# EAGLE board hand_pcb (EAGLE 7.3.0), part 1 of 3
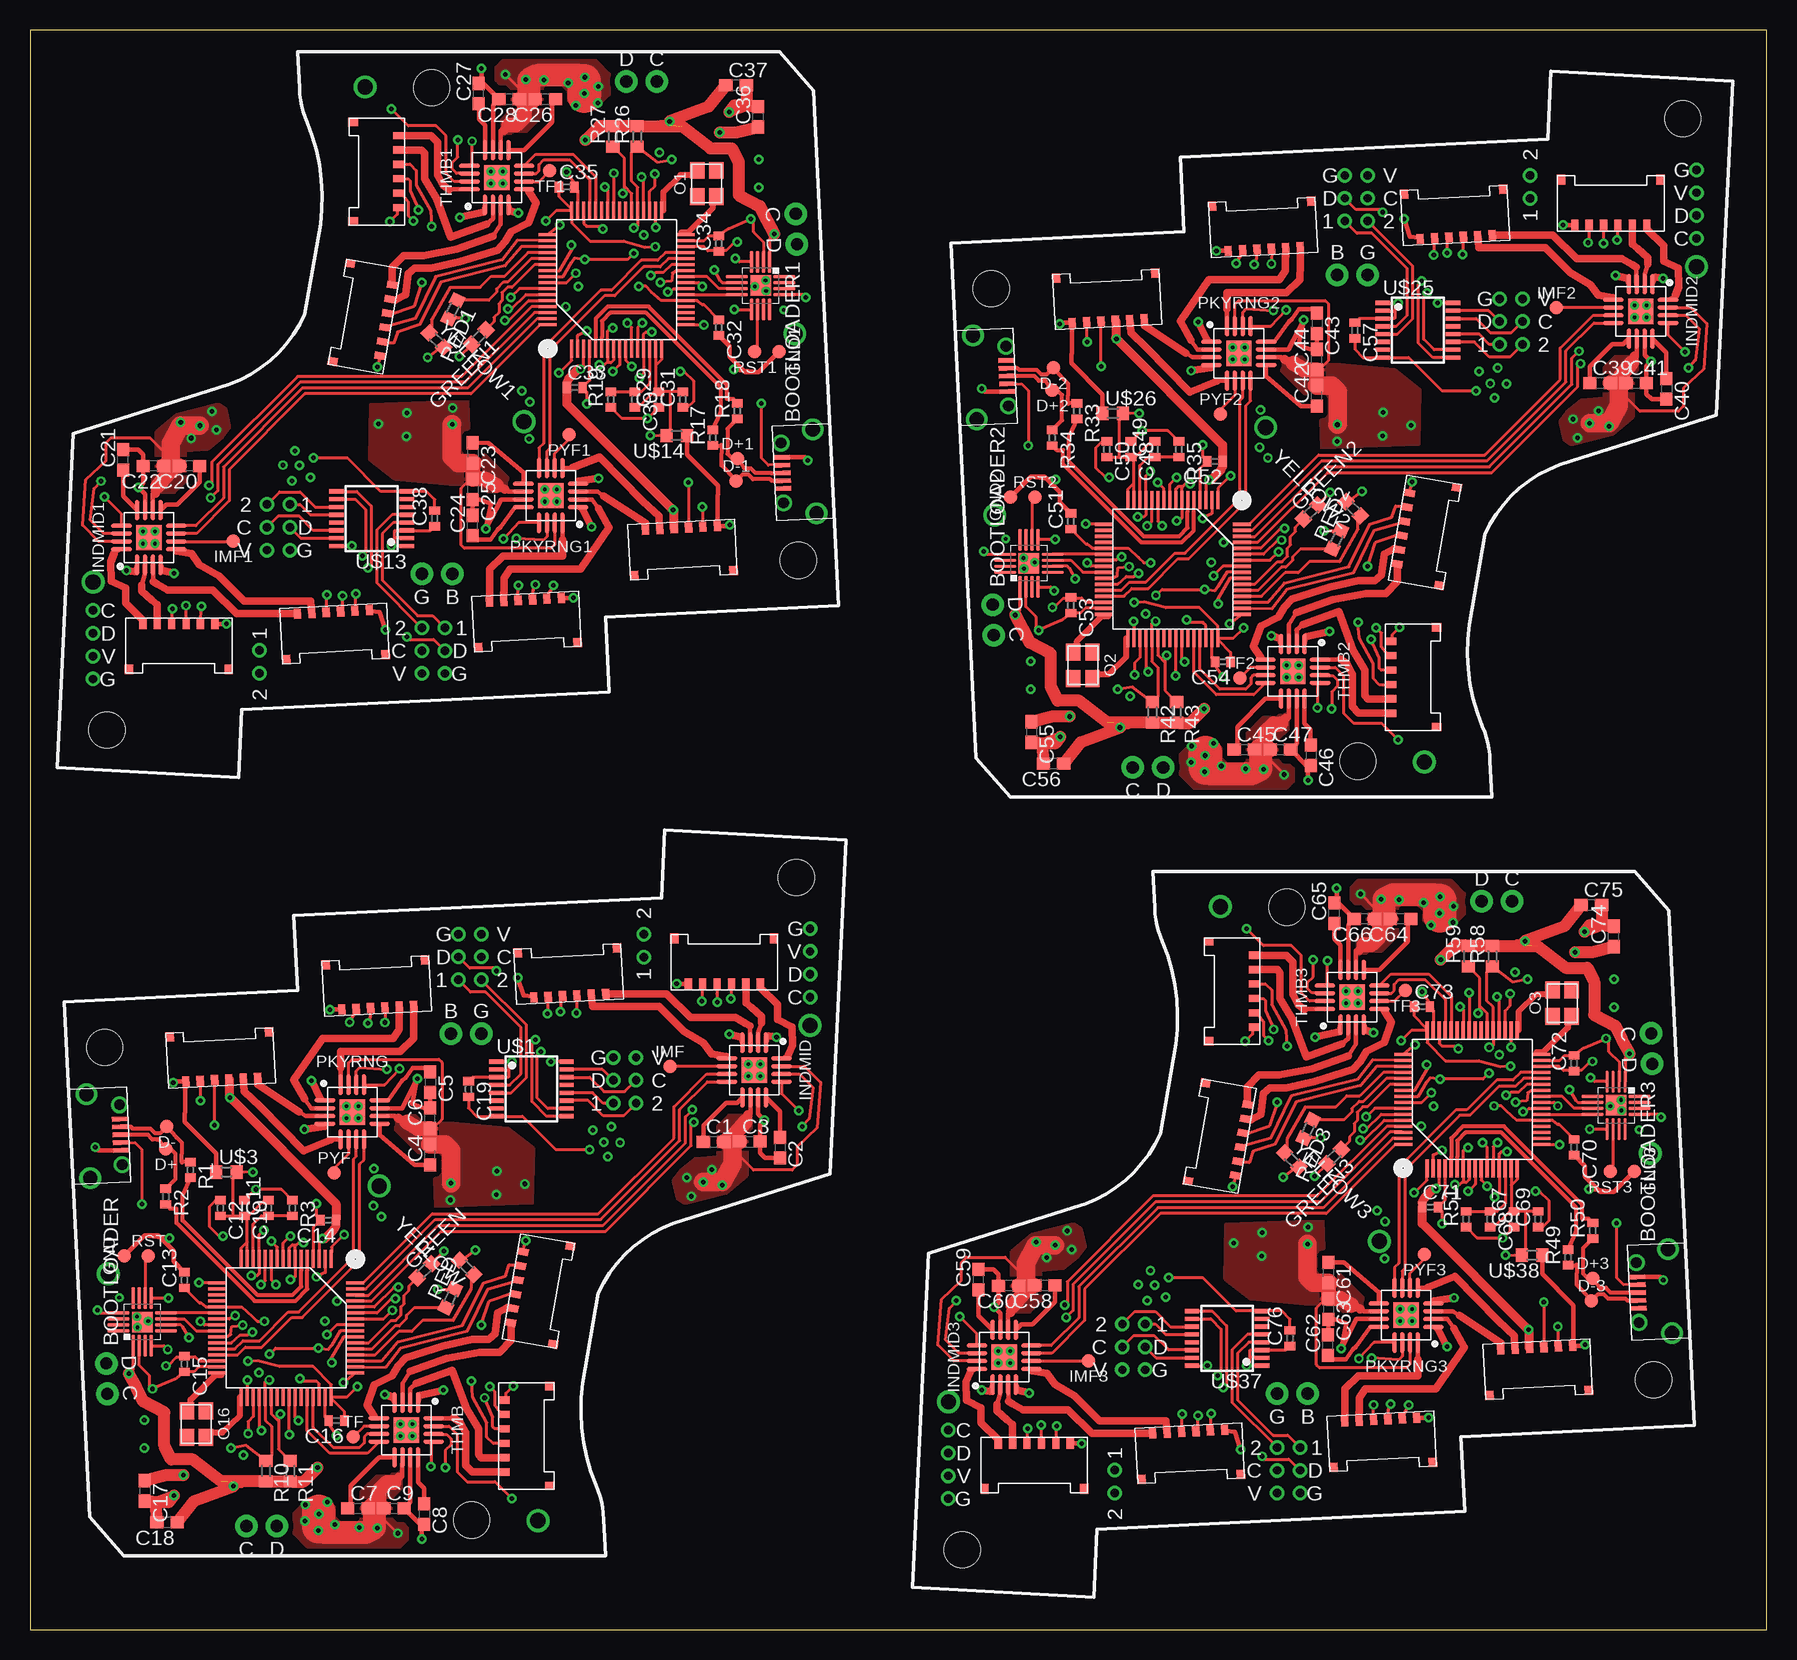
[diagram p0: board, top side]
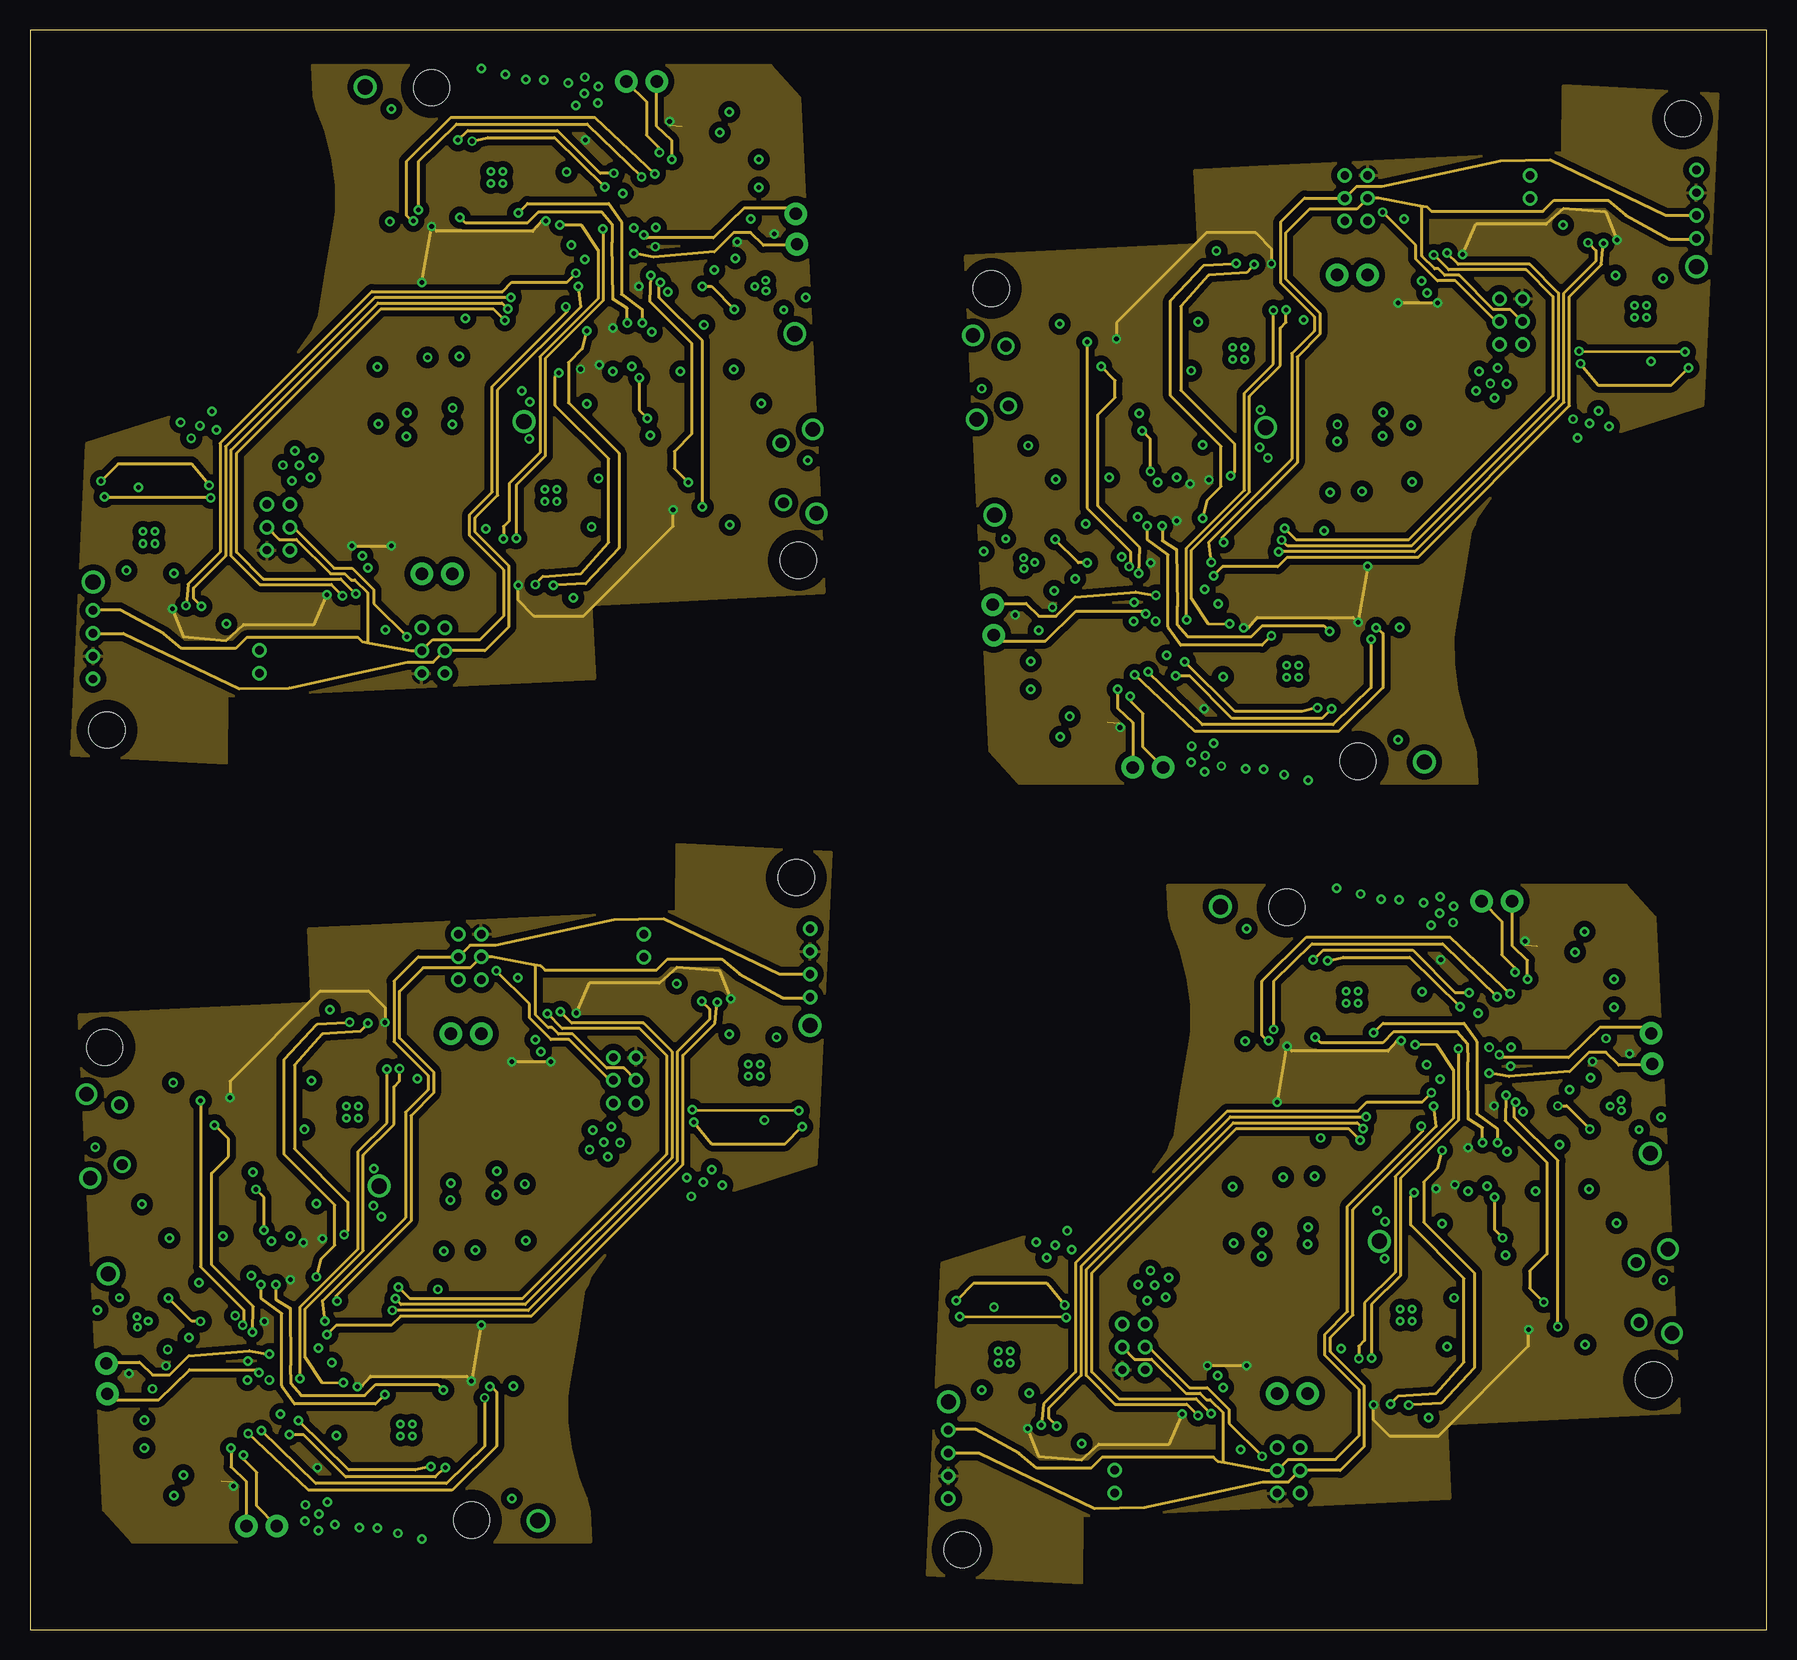
[diagram p1: board, inner layer Route2]
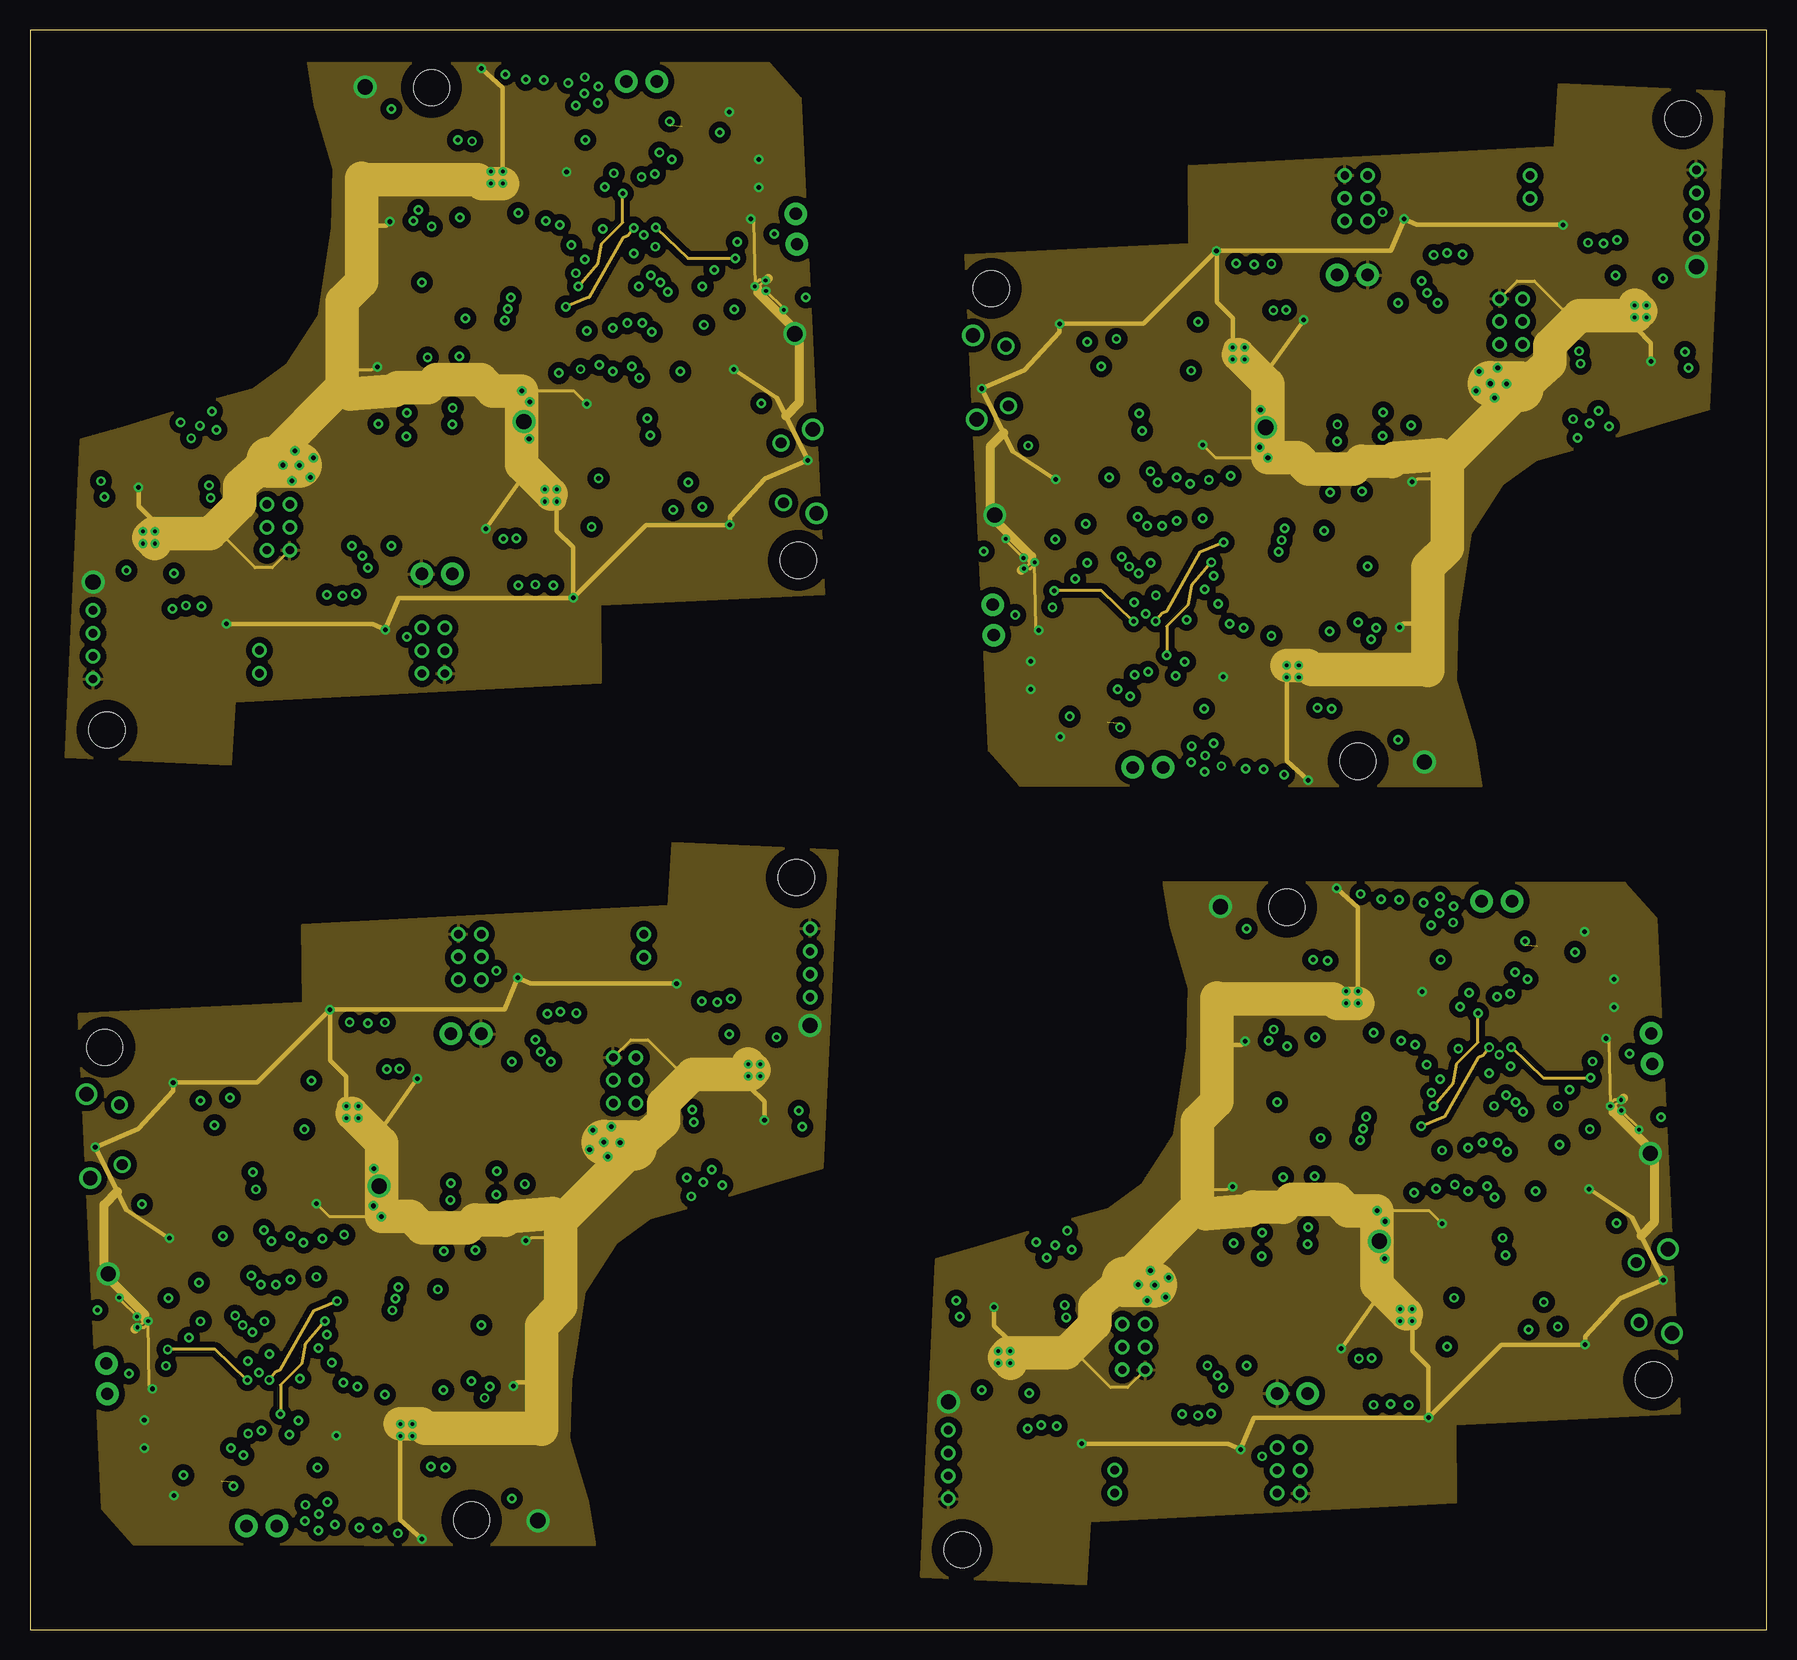
[diagram p2: board, inner layer Route15]
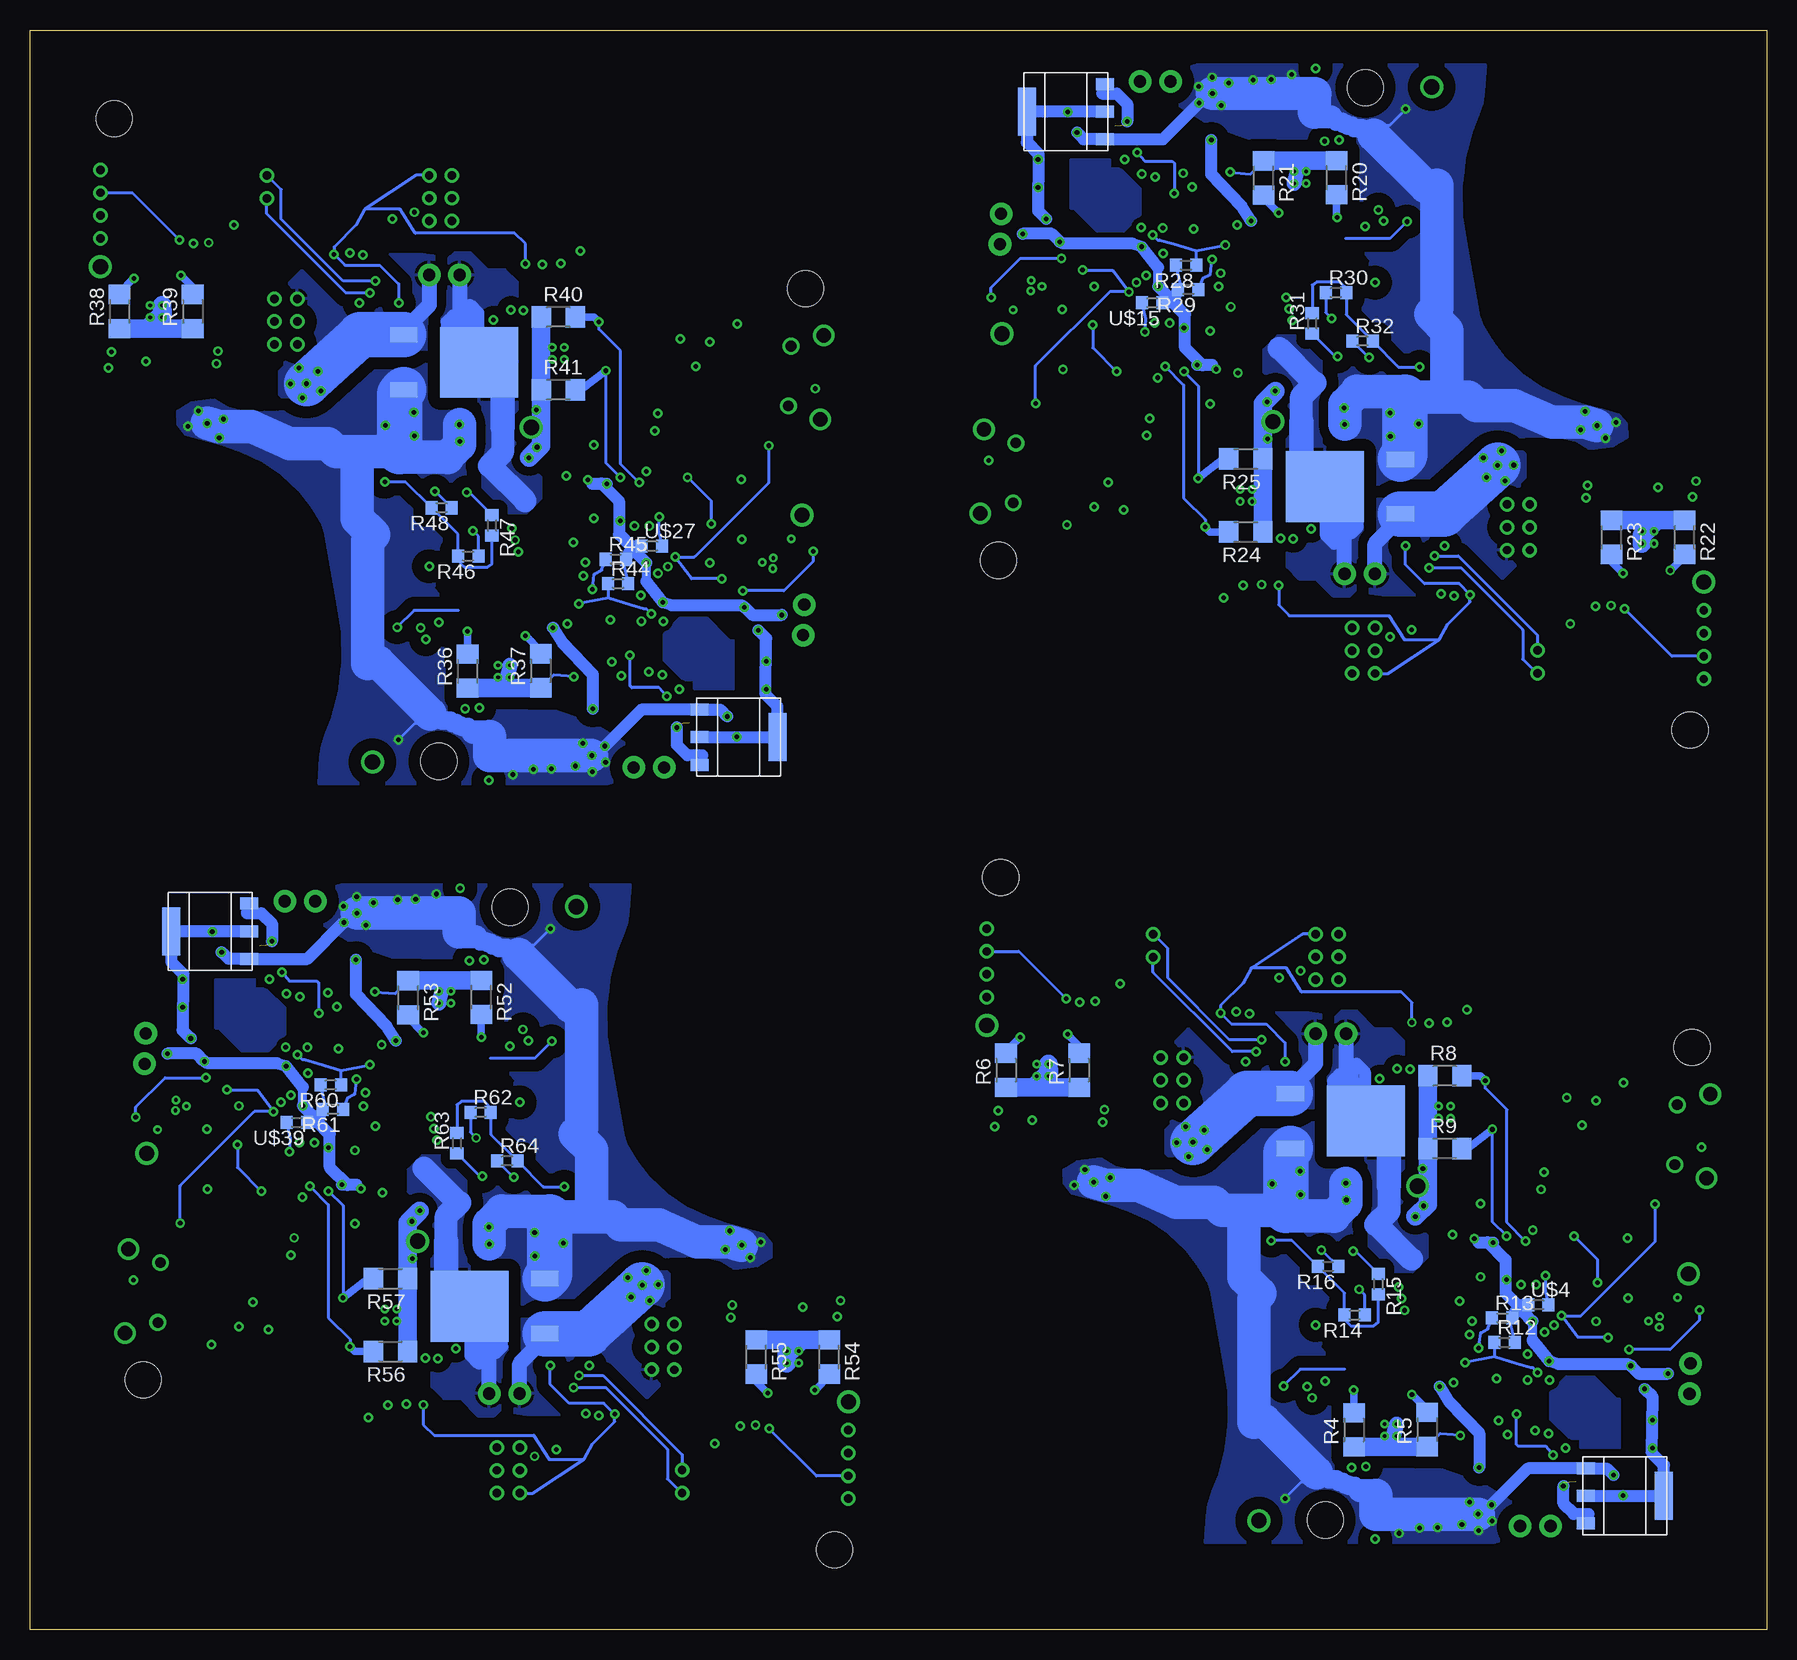
[diagram p3: board, bottom side, seen from below]

Size 144.78 x 133.35 mm. Coordinates in mm from the lower left corner, seen from the top.
Outline: 0,0 144.78,0 144.78,133.35 0,133.35 0,0
Copper layers (1*2*15*16): Top 0.035mm / dielectric 0.2mm / Route2 0.035mm / dielectric 0.2mm / Route15 0.035mm / dielectric 0.2mm / Bottom 0.035mm
Design rules "default *": minimum track width 10mil, minimum drill 15mil, track to track 6mil, track to pad 6mil, pad to pad 6mil, via to via 6mil, smd to smd 6mil, copper to edge 40mil, drill to drill 8mil, minimum pad ring 10mil, minimum via ring 8mil, stop-mask expansion 4mil, vias tented up to drill 0mil, thermal gap 10mil
Net classes: 1 USB: width 0.333 mm, drill 0.333 mm, clearance 0.178 mm; 2 VCC_Pour: clearance 0.762 mm to class 1; 3 GND_Pour: clearance 0.762 mm to class 1
Holes 3 mm at 6.24,48.55 63.87,62.7 36.81,9.15 64.04,89.15 6.41,75 33.47,128.55 80.13,111.79 137.76,125.94 110.7,72.39 135.34,20.82 77.71,6.67 104.77,60.22
tKeepout: area 4.1,46.4 to 8.3,50.6; area 61.8,60.6 to 66,64.8; area 34.7,7 to 38.9,11.2; area 61.9,87 to 66.1,91.2; area 4.3,72.9 to 8.5,77.1; area 31.4,126.4 to 35.6,130.6; area 78,109.7 to 82.2,113.9; area 135.7,123.8 to 139.9,128; area 108.6,70.3 to 112.8,74.5; area 133.2,18.7 to 137.4,22.9; area 75.6,4.6 to 79.8,8.8; area 102.7,58.1 to 106.9,62.3

## Footprints (pad centres in the part's own frame; a part is rotated, then mirrored left to right if it is on the bottom)
QFN16 = smd 1.85 x 0.3: 1 -1.975,0.75; 2 -1.975,0.25; 3 -1.975,-0.25; 4 -1.975,-0.75; 9 1.975,-0.75; 10 1.975,-0.25; 11 1.975,0.25; 12 1.975,0.75 | smd 0.3 x 1.85: 5 -0.75,-1.975; 6 -0.25,-1.975; 7 0.25,-1.975; 8 0.75,-1.975; 13 0.75,1.975; 14 0.25,1.975; 15 -0.25,1.975; 16 -0.75,1.975 | smd 1.7 x 1.7: TH 0,0
C0603 = smd 1.1 x 1: 1 -0.85,0; 2 0.85,0
C0402 = smd 0.7 x 0.9: 1 -0.65,0; 2 0.65,0
TESTPAD = smd 1.143 x 1.143: P$1 0,0
L0603 = smd 1 x 1.1: 1 -0.85,0; 2 0.85,0
LQFP-64-10-10 = smd 1.5 x 0.254: 1 -5.75,3.75; 2 -5.75,3.25; 3 -5.75,2.75; 4 -5.75,2.25; 5 -5.75,1.75; 6 -5.75,1.25; 7 -5.75,0.75; 8 -5.75,0.25; 9 -5.75,-0.25; 10 -5.75,-0.75; 11 -5.75,-1.25; 12 -5.75,-1.75; 13 -5.75,-2.25; 14 -5.75,-2.75; 15 -5.75,-3.25; 16 -5.75,-3.75; 33 5.75,-3.75; 34 5.75,-3.25; 35 5.75,-2.75; 36 5.75,-2.25; 37 5.75,-1.75; 38 5.75,-1.25; 39 5.75,-0.75; 40 5.75,-0.25; 41 5.75,0.25; 42 5.75,0.75; 43 5.75,1.25; 44 5.75,1.75; 45 5.75,2.25; 46 5.75,2.75; 47 5.75,3.25; 48 5.75,3.75 | smd 0.254 x 1.5: 17 -3.75,-5.75; 18 -3.25,-5.75; 19 -2.75,-5.75; 20 -2.25,-5.75; 21 -1.75,-5.75; 22 -1.25,-5.75; 23 -0.75,-5.75; 24 -0.25,-5.75; 25 0.25,-5.75; 26 0.75,-5.75; 27 1.25,-5.75; 28 1.75,-5.75; 29 2.25,-5.75; 30 2.75,-5.75; 31 3.25,-5.75; 32 3.75,-5.75; 49 3.75,5.75; 50 3.25,5.75; 51 2.75,5.75; 52 2.25,5.75; 53 1.75,5.75; 54 1.25,5.75; 55 0.75,5.75; 56 0.25,5.75; 57 -0.25,5.75; 58 -0.75,5.75; 59 -1.25,5.75; 60 -1.75,5.75; 61 -2.25,5.75; 62 -2.75,5.75; 63 -3.25,5.75; 64 -3.75,5.75
DF57H-6P-TOP = smd 0.6 x 0.85: 1 -3,2.3; 2 -1.8,2.3; 3 -0.6,2.3; 4 0.6,2.3; 5 1.8,2.3; 6 3,2.3 | smd 0.7 x 0.8: P$1 -4.15,-1.475; P$2 4.15,-1.475
WQFN-16 = smd 1.75 x 0.35: 1 -2.275,0.975; 2 -2.275,0.325; 3 -2.275,-0.325; 4 -2.275,-0.975; 9 2.275,-0.975; 10 2.275,-0.325; 11 2.275,0.325; 12 2.275,0.975 | smd 0.35 x 1.75: 5 -0.975,-2.275; 6 -0.325,-2.275; 7 0.325,-2.275; 8 0.975,-2.275; 13 0.975,2.275; 14 0.325,2.275; 15 -0.325,2.275; 16 -0.975,2.275 | smd 2.1 x 2.1: PPAD 0,0
NX3225SA = smd 1.4 x 1.2: 1 -1.1,-0.8; 2 1.1,-0.8; 3 1.1,0.8; 4 -1.1,0.8
R0402 = smd 0.7 x 0.9: 1 -0.65,0; 2 0.65,0
R1206 = smd 1.6 x 1.803: 1 -1.422,0; 2 1.422,0
R0603 = smd 1 x 1.1: 1 -0.85,0; 2 0.85,0
TSSOP16 = smd 0.35 x 1.2: 1 -2.275,-2.925; 2 -1.625,-2.925; 3 -0.975,-2.925; 4 -0.325,-2.925; 5 0.325,-2.925; 6 0.975,-2.925; 7 1.625,-2.925; 8 2.275,-2.925; 9 2.275,2.925; 10 1.625,2.925; 11 0.975,2.925; 12 0.325,2.925; 13 -0.325,2.925; 14 -0.975,2.925; 15 -1.625,2.925; 16 -2.275,2.925
PG-TO-252-3 = smd 1.295 x 2.311: 1 -2.286,-4.191; 3 2.286,-4.191 | smd 5.893 x 6.502: 2 0,2.095
PSENSE = drill 0.7: 1 0,-3.81; 2 1.905,-3.81; C 1.905,-1.905; D 0,-1.905; G 0,0; V 1.905,0
PSENSE2 = drill 0.7: 1 0,0; 2 1.905,0
PSENSE4 = drill 0.7: C 0,-5.715; D 0,-3.81; G 0,0; V 0,-1.905
MIC39100 = smd 1 x 1.5: 1 -2.3,-3.25; 2 0,-3.25; 3 2.3,-3.25 | smd 4 x 1.5: TAB 0,3.25
THRUHOLE2 = drill 1.016 pad 1.88: B -1.27,0; G 1.27,0
THRUHOLEI2C = drill 1.016 pad 1.88: SCL 1.27,0; SDA -1.27,0
10118194-0001LF = smd 0.4 x 1.35: 1 -1.3,2.7; 2 -0.65,2.7; 3 0,2.7; 4 0.65,2.7; 5 1.3,2.7 | drill 0.9 pad 1.4: P$6 -2.5,2.7; P$7 2.5,2.7 | drill 1.2: P$8 -3.5,0; P$9 3.5,0

## Placement (x,y rotation side)
BOOTLOADER  MKL02Z32CORRECT  [QFN16]  9.37,25.65 90 top
BOOTLOADER1  MKL02Z32CORRECT  [QFN16]  60.91,112.05 270 top
BOOTLOADER2  MKL02Z32CORRECT  [QFN16]  83.26,88.89 90 top
BOOTLOADER3  MKL02Z32CORRECT  [QFN16]  132.21,43.72 270 top
C1  0.01  [C0603]  56.98,40.68 0 top
C2  2.2  [C0603]  62.52,40.18 270 top
C3  10  [C0603]  60,40.69 0 top
C4  0.01  [C0603]  33.37,39.61 90 top
C5  2.2  [C0603]  33.37,45.64 270 top
C6  10  [C0603]  33.37,42.63 90 top
C7  0.01  [C0603]  27.33,10.12 0 top
C8  2.2  [C0603]  32.87,9.65 270 top
C9  10  [C0603]  30.35,10.13 0 top
C10  2.2  [C0402]  17.87,35.15 270 top
C11  0.1  [C0402]  19.87,35.15 90 top
C12  0.1  [C0402]  15.87,35.15 270 top
C13  0.1  [C0402]  12.87,29.15 90 top
C14  0.1  [C0402]  24.87,34.15 180 top
C15  0.1  [C0402]  12.87,22.15 270 top
C16  0.1  [C0402]  25.54,17.44 180 top
C17  [C0603]  9.58,11.58 270 top
C18  [C0603]  11.43,8.94 180 top
C19  0.1  [C0402]  36.55,45.06 270 top
C20  0.01  [C0603]  13.3,97.01 180 top
C21  2.2  [C0603]  7.76,97.51 90 top
C22  10  [C0603]  10.28,97.01 180 top
C23  0.01  [C0603]  36.91,98.09 270 top
C24  2.2  [C0603]  36.91,92.05 90 top
C25  10  [C0603]  36.91,95.06 270 top
C26  0.01  [C0603]  42.95,127.57 180 top
C27  2.2  [C0603]  37.41,128.05 90 top
C28  10  [C0603]  39.93,127.57 180 top
C29  2.2  [C0402]  52.41,102.55 90 top
C30  0.1  [C0402]  50.41,102.55 270 top
C31  0.1  [C0402]  54.41,102.55 90 top
C32  0.1  [C0402]  57.41,108.55 270 top
C33  0.1  [C0402]  45.41,103.55 0 top
C34  0.1  [C0402]  57.41,115.55 90 top
C35  0.1  [C0402]  44.74,120.26 0 top
C36  [C0603]  60.71,126.11 90 top
C37  [C0603]  58.85,128.75 0 top
C38  0.1  [C0402]  33.73,92.63 90 top
C39  0.01  [C0603]  130.87,103.93 0 top
C40  2.2  [C0603]  136.41,103.43 270 top
C41  10  [C0603]  133.89,103.93 0 top
C42  0.01  [C0603]  107.26,102.85 90 top
C43  2.2  [C0603]  107.26,108.89 270 top
C44  10  [C0603]  107.26,105.88 90 top
C45  0.01  [C0603]  101.22,73.37 0 top
C46  2.2  [C0603]  106.76,72.89 270 top
C47  10  [C0603]  104.24,73.37 0 top
C48  2.2  [C0402]  91.76,98.39 270 top
C49  0.1  [C0402]  93.76,98.39 90 top
C50  0.1  [C0402]  89.76,98.39 270 top
C51  0.1  [C0402]  86.76,92.39 90 top
C52  0.1  [C0402]  98.76,97.39 180 top
C53  0.1  [C0402]  86.76,85.39 270 top
C54  0.1  [C0402]  99.43,80.68 180 top
C55  [C0603]  83.46,74.83 270 top
C56  [C0603]  85.32,72.19 180 top
C57  0.1  [C0402]  110.44,108.31 270 top
C58  0.01  [C0603]  84.6,28.69 180 top
C59  2.2  [C0603]  79.06,29.19 90 top
C60  10  [C0603]  81.58,28.68 180 top
C61  0.01  [C0603]  108.21,29.76 270 top
C62  2.2  [C0603]  108.21,23.72 90 top
C63  10  [C0603]  108.21,26.73 270 top
C64  0.01  [C0603]  114.25,59.25 180 top
C65  2.2  [C0603]  108.71,59.72 90 top
C66  10  [C0603]  111.23,59.24 180 top
C67  2.2  [C0402]  123.71,34.22 90 top
C68  0.1  [C0402]  121.71,34.22 270 top
C69  0.1  [C0402]  125.71,34.22 90 top
C70  0.1  [C0402]  128.71,40.22 270 top
C71  0.1  [C0402]  116.71,35.22 0 top
C72  0.1  [C0402]  128.71,47.22 90 top
C73  0.1  [C0402]  116.04,51.93 0 top
C74  [C0603]  132,57.78 90 top
C75  [C0603]  130.15,60.43 0 top
C76  0.1  [C0402]  105.03,24.31 90 top
D+  TESTPAD  [TESTPAD]  11.32,40.08 180 top
D+1  TESTPAD  [TESTPAD]  58.96,97.61 0 top
D+2  TESTPAD  [TESTPAD]  85.21,103.33 180 top
D+3  TESTPAD  [TESTPAD]  130.26,29.29 0 top
D-  TESTPAD  [TESTPAD]  11.41,41.94 180 top
D-1  TESTPAD  [TESTPAD]  58.87,95.75 0 top
D-2  TESTPAD  [TESTPAD]  85.3,105.19 180 top
D-3  TESTPAD  [TESTPAD]  130.17,27.42 0 top
GND  TESTPAD  [TESTPAD]  7.85,31.17 90 top
GND1  TESTPAD  [TESTPAD]  62.43,106.53 270 top
GND2  TESTPAD  [TESTPAD]  81.74,94.41 90 top
GND3  TESTPAD  [TESTPAD]  133.73,38.2 270 top
GREEN  LED0603  [L0603]  32.87,29.92 45 top
GREEN1  LED0603  [L0603]  37.41,107.77 225 top
GREEN2  LED0603  [L0603]  106.76,93.17 45 top
GREEN3  LED0603  [L0603]  108.71,39.45 225 top
HAND_MICRO  MK20DX256VLH7  [LQFP-64-10-10]  21.37,25.15 270 top
HAND_MICRO1  MK20DX256VLH7  [LQFP-64-10-10]  48.91,112.55 90 top
HAND_MICRO2  MK20DX256VLH7  [LQFP-64-10-10]  95.26,88.39 270 top
HAND_MICRO3  MK20DX256VLH7  [LQFP-64-10-10]  120.21,44.22 90 top
IMF  TESTPAD  [TESTPAD]  53.34,46.94 0 top
IMF1  TESTPAD  [TESTPAD]  16.94,90.75 180 top
IMF2  TESTPAD  [TESTPAD]  127.23,110.19 0 top
IMF3  TESTPAD  [TESTPAD]  88.24,22.43 180 top
INDEX  DF57H-6PTOP  [DF57H-6P-TOP]  57.87,56.15 180 top
INDEX1  DF57H-6PTOP  [DF57H-6P-TOP]  12.41,81.55 0 top
INDEX2  DF57H-6PTOP  [DF57H-6P-TOP]  131.76,119.39 180 top
INDEX3  DF57H-6PTOP  [DF57H-6P-TOP]  83.71,13.22 0 top
INDMID  DRV8833  [WQFN-16]  60.37,46.65 270 top
INDMID1  DRV8833  [WQFN-16]  9.91,91.05 90 top
INDMID2  DRV8833  [WQFN-16]  134.26,109.89 270 top
INDMID3  DRV8833  [WQFN-16]  81.21,22.72 90 top
MIDDLE  DF57H-6PTOP  [DF57H-6P-TOP]  44.87,55.15 183 top
MIDDLE1  DF57H-6PTOP  [DF57H-6P-TOP]  25.41,82.55 3 top
MIDDLE2  DF57H-6PTOP  [DF57H-6P-TOP]  118.76,118.39 183 top
MIDDLE3  DF57H-6PTOP  [DF57H-6P-TOP]  96.71,14.22 3 top
O1  16MHz  [NX3225SA]  56.41,120.55 90 top
O2  16MHz  [NX3225SA]  87.76,80.39 270 top
O3  16MHz  [NX3225SA]  127.71,52.22 90 top
O16  16MHz  [NX3225SA]  13.87,17.15 270 top
PINKY  DF57H-6PTOP  [DF57H-6P-TOP]  15.87,48.15 183 top
PINKY1  DF57H-6PTOP  [DF57H-6P-TOP]  54.41,89.55 3 top
PINKY2  DF57H-6PTOP  [DF57H-6P-TOP]  89.76,111.39 183 top
PINKY3  DF57H-6PTOP  [DF57H-6P-TOP]  125.71,21.22 3 top
PKYRNG  DRV8833  [WQFN-16]  26.87,43.15 0 top
PKYRNG1  DRV8833  [WQFN-16]  43.41,94.55 180 top
PKYRNG2  DRV8833  [WQFN-16]  100.76,106.39 0 top
PKYRNG3  DRV8833  [WQFN-16]  114.71,26.22 180 top
PYF  TESTPAD  [TESTPAD]  25.35,38.07 0 top
PYF1  TESTPAD  [TESTPAD]  44.93,99.62 180 top
PYF2  TESTPAD  [TESTPAD]  99.24,101.32 0 top
PYF3  TESTPAD  [TESTPAD]  116.23,31.29 180 top
R1  33  [R0402]  13.37,38.33 270 top
R2  33  [R0402]  11.32,36.11 270 top
R3  470  [R0402]  21.87,35.15 270 top
R4  0.2  [R1206]  34.42,16.66 90 bottom
R5  0.2  [R1206]  28.32,16.69 90 bottom
R6  0.2  [R1206]  63.42,46.63 90 bottom
R7  0.2  [R1206]  57.33,46.63 90 bottom
R8  0.2  [R1206]  26.85,46.18 0 bottom
R9  0.2  [R1206]  26.85,40.11 0 bottom
R10  1k  [R0603]  19.67,13.23 270 top
R11  1k  [R0603]  21.69,13.23 270 top
R12  1k  [R0603]  21.87,23.95 0 bottom
R13  1k  [R0603]  22.06,25.98 0 bottom
R14  100  [R0603]  34.37,26.24 180 bottom
R15  200  [R0603]  32.38,28.8 270 bottom
R16  200  [R0603]  36.58,30.28 180 bottom
R17  33  [R0402]  56.91,99.36 90 top
R18  33  [R0402]  58.96,101.59 90 top
R19  470  [R0402]  48.41,102.55 90 top
R20  0.2  [R1206]  35.86,121.03 270 bottom
R21  0.2  [R1206]  41.96,121.01 270 bottom
R22  0.2  [R1206]  6.86,91.06 270 bottom
R23  0.2  [R1206]  12.95,91.06 270 bottom
R24  0.2  [R1206]  43.43,91.52 180 bottom
R25  0.2  [R1206]  43.43,97.59 180 bottom
R26  1k  [R0603]  50.61,124.46 90 top
R27  1k  [R0603]  48.59,124.46 90 top
R28  1k  [R0603]  48.41,113.74 180 bottom
R29  1k  [R0603]  48.22,111.71 180 bottom
R30  100  [R0603]  35.92,111.46 0 bottom
R31  200  [R0603]  37.9,108.89 90 bottom
R32  200  [R0603]  33.71,107.42 0 bottom
R33  33  [R0402]  87.26,101.58 270 top
R34  33  [R0402]  85.21,99.35 270 top
R35  470  [R0402]  95.76,98.39 270 top
R36  0.2  [R1206]  108.31,79.91 90 bottom
R37  0.2  [R1206]  102.21,79.93 90 bottom
R38  0.2  [R1206]  137.31,109.88 90 bottom
R39  0.2  [R1206]  131.22,109.88 90 bottom
R40  0.2  [R1206]  100.74,109.42 0 bottom
R41  0.2  [R1206]  100.74,103.35 0 bottom
R42  1k  [R0603]  93.56,76.48 270 top
R43  1k  [R0603]  95.58,76.48 270 top
R44  1k  [R0603]  95.76,87.2 0 bottom
R45  1k  [R0603]  95.95,89.23 0 bottom
R46  100  [R0603]  108.25,89.48 180 bottom
R47  200  [R0603]  106.27,92.05 270 bottom
R48  200  [R0603]  110.46,93.52 180 bottom
R49  33  [R0402]  128.21,31.03 90 top
R50  33  [R0402]  130.26,33.26 90 top
R51  470  [R0402]  119.71,34.22 90 top
R52  0.2  [R1206]  107.16,52.7 270 bottom
R53  0.2  [R1206]  113.26,52.68 270 bottom
R54  0.2  [R1206]  78.16,22.73 270 bottom
R55  0.2  [R1206]  84.25,22.73 270 bottom
R56  0.2  [R1206]  114.73,23.19 180 bottom
R57  0.2  [R1206]  114.73,29.26 180 bottom
R58  1k  [R0603]  121.91,56.13 90 top
R59  1k  [R0603]  119.89,56.13 90 top
R60  1k  [R0603]  119.71,45.42 180 bottom
R61  1k  [R0603]  119.52,43.38 180 bottom
R62  100  [R0603]  107.21,43.13 0 bottom
R63  200  [R0603]  109.19,40.56 90 bottom
R64  200  [R0603]  105,39.09 0 bottom
RED  LED0603  [L0603]  35.03,27.64 65 top
RED1  LED0603  [L0603]  35.26,110.06 245 top
RED2  LED0603  [L0603]  108.92,90.88 65 top
RED3  LED0603  [L0603]  106.55,41.73 245 top
RING  DF57H-6PTOP  [DF57H-6P-TOP]  28.87,54.15 183 top
RING1  DF57H-6PTOP  [DF57H-6P-TOP]  41.41,83.55 3 top
RING2  DF57H-6PTOP  [DF57H-6P-TOP]  102.76,117.39 183 top
RING3  DF57H-6PTOP  [DF57H-6P-TOP]  112.71,15.22 3 top
RST  TESTPAD  [TESTPAD]  9.87,31.17 0 top
RST1  TESTPAD  [TESTPAD]  60.41,106.53 180 top
RST2  TESTPAD  [TESTPAD]  83.76,94.41 0 top
RST3  TESTPAD  [TESTPAD]  131.71,38.2 180 top
TF  TESTPAD  [TESTPAD]  26.95,16.08 0 top
TF1  TESTPAD  [TESTPAD]  43.33,121.62 180 top
TF2  TESTPAD  [TESTPAD]  100.84,79.32 0 top
TF3  TESTPAD  [TESTPAD]  114.63,53.29 180 top
THMB  DRV8833  [WQFN-16]  31.37,16.65 270 top
THMB1  DRV8833  [WQFN-16]  38.91,121.05 90 top
THMB2  DRV8833  [WQFN-16]  105.26,79.89 270 top
THMB3  DRV8833  [WQFN-16]  110.21,52.72 90 top
THUMB_A  DF57H-6PTOP  [DF57H-6P-TOP]  41.87,16.15 90 top
THUMB_A1  DF57H-6PTOP  [DF57H-6P-TOP]  28.41,121.55 270 top
THUMB_A2  DF57H-6PTOP  [DF57H-6P-TOP]  115.76,79.39 90 top
THUMB_A3  DF57H-6PTOP  [DF57H-6P-TOP]  99.71,53.22 270 top
THUMB_B  DF57H-6PTOP  [DF57H-6P-TOP]  42.87,28.15 80 top
THUMB_B1  DF57H-6PTOP  [DF57H-6P-TOP]  27.41,109.55 260 top
THUMB_B2  DF57H-6PTOP  [DF57H-6P-TOP]  116.76,91.39 80 top
THUMB_B3  DF57H-6PTOP  [DF57H-6P-TOP]  98.71,41.22 260 top
U$1  TCA9534TSSOP  [TSSOP16]  41.8,45.08 270 top
U$2  SPD15P10PLG  [PG-TO-252-3]  35.53,42.41 270 bottom
U$3  [L0603]  16.37,38.15 0 top
U$4  [L0603]  19.05,27.08 0 bottom
U$5  PSENSE  [PSENSE]  35.71,57.99 0 top
U$6  PSENSE2  [PSENSE2]  51.16,56.06 90 top
U$7  PSENSE  [PSENSE]  48.62,47.7 0 top
U$8  PSENSE4  [PSENSE4]  65.02,58.45 0 top
U$9  MIC391003.3  [MIC39100]  11.84,11.15 270 bottom
U$10  THRUHOLE2  [THRUHOLE2]  36.35,49.68 0 top
U$11  THRUHOLEI2C  [THRUHOLEI2C]  19.3,8.64 180 top
U$12  THRUHOLEI2C  [THRUHOLEI2C]  6.4,20.93 272 top
U$13  TCA9534TSSOP  [TSSOP16]  28.48,92.62 90 top
U$14  [L0603]  53.91,99.55 180 top
U$15  [L0603]  51.23,110.61 180 bottom
U$16  SPD15P10PLG  [PG-TO-252-3]  34.75,95.29 90 bottom
U$17  PSENSE  [PSENSE]  34.57,79.71 180 top
U$18  PSENSE  [PSENSE]  21.67,89.99 180 top
U$19  PSENSE2  [PSENSE2]  19.13,81.64 270 top
U$20  PSENSE4  [PSENSE4]  5.26,79.25 180 top
U$21  MIC391003.3  [MIC39100]  58.45,126.54 90 bottom
U$22  THRUHOLE2  [THRUHOLE2]  33.93,88.01 180 top
U$23  THRUHOLEI2C  [THRUHOLEI2C]  50.98,129.06 0 top
U$24  THRUHOLEI2C  [THRUHOLEI2C]  63.88,116.76 92 top
U$25  TCA9534TSSOP  [TSSOP16]  115.69,108.32 270 top
U$26  [L0603]  90.26,101.39 0 top
U$27  [L0603]  92.94,90.33 0 bottom
U$28  SPD15P10PLG  [PG-TO-252-3]  109.42,105.65 270 bottom
U$29  PSENSE  [PSENSE]  109.6,121.23 0 top
U$30  PSENSE  [PSENSE]  122.5,110.95 0 top
U$31  PSENSE2  [PSENSE2]  125.04,119.3 90 top
U$32  PSENSE4  [PSENSE4]  138.91,121.69 0 top
U$33  MIC391003.3  [MIC39100]  85.72,74.4 270 bottom
U$34  THRUHOLE2  [THRUHOLE2]  110.24,112.93 0 top
U$35  THRUHOLEI2C  [THRUHOLEI2C]  93.19,71.88 180 top
U$36  THRUHOLEI2C  [THRUHOLEI2C]  80.29,84.18 272 top
U$37  TCA9534TSSOP  [TSSOP16]  99.78,24.29 90 top
U$38  [L0603]  125.21,31.22 180 top
U$39  [L0603]  122.53,42.28 180 bottom
U$40  SPD15P10PLG  [PG-TO-252-3]  106.05,26.96 90 bottom
U$41  PSENSE  [PSENSE]  105.87,11.38 180 top
U$42  PSENSE  [PSENSE]  92.96,21.67 180 top
U$43  PSENSE2  [PSENSE2]  90.42,13.31 270 top
U$44  PSENSE4  [PSENSE4]  76.56,10.92 180 top
U$45  MIC391003.3  [MIC39100]  129.74,58.22 90 bottom
U$46  THRUHOLE2  [THRUHOLE2]  105.23,19.68 180 top
U$47  THRUHOLEI2C  [THRUHOLEI2C]  122.28,60.73 0 top
U$48  THRUHOLEI2C  [THRUHOLEI2C]  135.18,48.44 92 top
USB  10118194-0001LF  [10118194-0001LF]  4.87,41.15 272.5 top
USB1  10118194-0001LF  [10118194-0001LF]  65.41,96.55 92.5 top
USB2  10118194-0001LF  [10118194-0001LF]  78.76,104.39 272.5 top
USB3  10118194-0001LF  [10118194-0001LF]  136.71,28.22 92.5 top
YELLOW  LED0603  [L0603]  36.4,30.2 135 top
YELLOW1  LED0603  [L0603]  33.88,107.49 315 top
YELLOW2  LED0603  [L0603]  110.29,93.45 135 top
YELLOW3  LED0603  [L0603]  105.18,39.17 315 top

## Library data of the parts
BOOTLOADER BOOTLOADER1-BOOTLOADER3 D+ D+1-D+3 D- D-1-D-3 GND GND1-GND3 GREEN GREEN1-GREEN3 HAND_MICRO HAND_MICRO1-HAND_MICRO3 IMF IMF1-IMF3 INDEX INDEX1-INDEX3 INDMID INDMID1-INDMID3 MIDDLE MIDDLE1-MIDDLE3 O1-O3 O16 PINKY PINKY1-PINKY3 PKYRNG PKYRNG1-PKYRNG3 PYF PYF1-PYF3 RED RED1-RED3 RING RING1-RING3 RST RST1-RST3 TF TF1-TF3 THMB THMB1-THMB3 THUMB_A THUMB_A1-THUMB_A3 THUMB_B THUMB_B1-THUMB_B3 U$1-U$48 USB USB1-USB3 YELLOW YELLOW1-YELLOW3 = 445-eagle-lib
C1-C76 R1-R64 = rcl

## Nets
+3V1: BOOTLOADER1.1 C32.1 C33.1 C34.1 C35.1 C37.1 C38.1 HAND_MICRO1.3 HAND_MICRO1.7 HAND_MICRO1.8 HAND_MICRO1.21 HAND_MICRO1.30 HAND_MICRO1.48 INDEX1.3 MIDDLE1.3 PINKY1.3 R26.2 R27.2 R28.2 R29.2 RING1.3 THUMB_A1.3 THUMB_B1.3 U$13.1 U$13.2 U$13.3 U$13.16 U$15.1 U$17.V U$18.V U$20.V U$21.3
+3V2: BOOTLOADER2.1 C51.1 C52.1 C53.1 C54.1 C56.1 C57.1 HAND_MICRO2.3 HAND_MICRO2.7 HAND_MICRO2.8 HAND_MICRO2.21 HAND_MICRO2.30 HAND_MICRO2.48 INDEX2.3 MIDDLE2.3 PINKY2.3 R42.2 R43.2 R44.2 R45.2 RING2.3 THUMB_A2.3 THUMB_B2.3 U$25.1 U$25.2 U$25.3 U$25.16 U$27.1 U$29.V U$30.V U$32.V U$33.3
+3V3: BOOTLOADER.1 C13.1 C14.1 C15.1 C16.1 C18.1 C19.1 HAND_MICRO.3 HAND_MICRO.7 HAND_MICRO.8 HAND_MICRO.21 HAND_MICRO.30 HAND_MICRO.48 INDEX.3 MIDDLE.3 PINKY.3 R10.2 R11.2 R12.2 R13.2 RING.3 THUMB_A.3 THUMB_B.3 U$1.1 U$1.2 U$1.3 U$1.16 U$4.1 U$5.V U$7.V U$8.V U$9.3
+3V4: BOOTLOADER3.1 C70.1 C71.1 C72.1 C73.1 C75.1 C76.1 HAND_MICRO3.3 HAND_MICRO3.7 HAND_MICRO3.8 HAND_MICRO3.21 HAND_MICRO3.30 HAND_MICRO3.48 INDEX3.3 MIDDLE3.3 PINKY3.3 R58.2 R59.2 R60.2 R61.2 RING3.3 THUMB_A3.3 THUMB_B3.3 U$37.1 U$37.2 U$37.3 U$37.16 U$39.1 U$41.V U$42.V U$44.V U$45.3
+5V: C1.2 C3.1 C4.2 C6.1 C7.2 C9.1 C17.1 INDMID.10 INDMID.15 PKYRNG.10 PKYRNG.15 THMB.10 THMB.15 U$2.3 U$9.1
+5V1: C20.2 C22.1 C23.2 C25.1 C26.2 C28.1 C36.1 INDMID1.10 INDMID1.15 PKYRNG1.10 PKYRNG1.15 THMB1.10 THMB1.15 U$16.3 U$21.1
+5V2: C39.2 C41.1 C42.2 C44.1 C45.2 C47.1 C55.1 INDMID2.10 INDMID2.15 PKYRNG2.10 PKYRNG2.15 THMB2.10 THMB2.15 U$28.3 U$33.1
+5V3: C58.2 C60.1 C61.2 C63.1 C64.2 C66.1 C74.1 INDMID3.10 INDMID3.15 PKYRNG3.10 PKYRNG3.15 THMB3.10 THMB3.15 U$40.3 U$45.1
EN1: U$1.4 U$5.1
EN2: U$1.5 U$5.2
EN3: U$1.12 U$7.1
EN4: U$1.11 U$7.2
EN5: U$1.10 U$6.1
EN6: U$1.9 U$6.2
EN7: U$13.4 U$17.1
EN8: U$13.5 U$17.2
EN9: U$13.9 U$19.2
EN10: U$13.12 U$18.1
EN11: U$13.11 U$18.2
EN12: U$13.10 U$19.1
EN13: U$25.4 U$29.1
EN14: U$25.5 U$29.2
EN15: U$25.9 U$31.2
EN16: U$25.12 U$30.1
EN17: U$25.11 U$30.2
EN18: U$25.10 U$31.1
EN19: U$37.4 U$41.1
EN20: U$37.5 U$41.2
EN21: U$37.9 U$43.2
EN22: U$37.12 U$42.1
EN23: U$37.11 U$42.2
EN24: U$37.10 U$43.1
GND: BOOTLOADER.2 BOOTLOADER.TH C2.2 C3.2 C5.2 C6.2 C8.2 C9.2 C13.2 C14.2 C15.2 C16.2 C17.2 C18.2 C19.2 GND.P$1 HAND_MICRO.4 HAND_MICRO.31 HAND_MICRO.47 INDEX.6 INDMID.11 INDMID.PPAD MIDDLE.6 PINKY.6 PKYRNG.11 PKYRNG.PPAD R4.1 R5.1 R6.1 R7.1 R8.1 R9.1 R14.2 R15.2 R16.2 RING.6 THMB.11 THMB.PPAD THUMB_A.6 THUMB_B.6 U$1.8 U$2.1 U$3.1 U$5.G U$7.G U$8.G U$9.2 U$9.TAB U$10.G USB.5
GND1: BOOTLOADER1.2 BOOTLOADER1.TH C21.2 C22.2 C24.2 C25.2 C27.2 C28.2 C32.2 C33.2 C34.2 C35.2 C36.2 C37.2 C38.2 GND1.P$1 HAND_MICRO1.4 HAND_MICRO1.31 HAND_MICRO1.47 INDEX1.6 INDMID1.11 INDMID1.PPAD MIDDLE1.6 PINKY1.6 PKYRNG1.11 PKYRNG1.PPAD R20.1 R21.1 R22.1 R23.1 R24.1 R25.1 R30.2 R31.2 R32.2 RING1.6 THMB1.11 THMB1.PPAD THUMB_A1.6 THUMB_B1.6 U$13.8 U$14.1 U$16.1 U$17.G U$18.G U$20.G U$21.2 U$21.TAB U$22.G USB1.5
GND2: BOOTLOADER2.2 BOOTLOADER2.TH C40.2 C41.2 C43.2 C44.2 C46.2 C47.2 C51.2 C52.2 C53.2 C54.2 C55.2 C56.2 C57.2 GND2.P$1 HAND_MICRO2.4 HAND_MICRO2.31 HAND_MICRO2.47 INDEX2.6 INDMID2.11 INDMID2.PPAD MIDDLE2.6 PINKY2.6 PKYRNG2.11 PKYRNG2.PPAD R36.1 R37.1 R38.1 R39.1 R40.1 R41.1 R46.2 R47.2 R48.2 RING2.6 THMB2.11 THMB2.PPAD THUMB_A2.6 THUMB_B2.6 U$25.8 U$26.1 U$28.1 U$29.G U$30.G U$32.G U$33.2 U$33.TAB U$34.G USB2.5
GND3: BOOTLOADER3.2 BOOTLOADER3.TH C59.2 C60.2 C62.2 C63.2 C65.2 C66.2 C70.2 C71.2 C72.2 C73.2 C74.2 C75.2 C76.2 GND3.P$1 HAND_MICRO3.4 HAND_MICRO3.31 HAND_MICRO3.47 INDEX3.6 INDMID3.11 INDMID3.PPAD MIDDLE3.6 PINKY3.6 PKYRNG3.11 PKYRNG3.PPAD R52.1 R53.1 R54.1 R55.1 R56.1 R57.1 R62.2 R63.2 R64.2 RING3.6 THMB3.11 THMB3.PPAD THUMB_A3.6 THUMB_B3.6 U$37.8 U$38.1 U$40.1 U$41.G U$42.G U$44.G U$45.2 U$45.TAB U$46.G USB3.5
IDX1: INDEX.1 INDMID.16
IDX2: INDEX.2 INDMID.2
IDX3: INDEX1.1 INDMID1.16
IDX4: INDEX1.2 INDMID1.2
IDX5: INDEX2.1 INDMID2.16
IDX6: INDEX2.2 INDMID2.2
IDX7: INDEX3.1 INDMID3.16
IDX8: INDEX3.2 INDMID3.2
IDXENC1: HAND_MICRO.58 INDEX.5
IDXENC2: HAND_MICRO.57 INDEX.4
IDXENC3: HAND_MICRO1.57 INDEX1.4
IDXENC4: HAND_MICRO1.58 INDEX1.5
IDXENC5: HAND_MICRO2.57 INDEX2.4
IDXENC6: HAND_MICRO2.58 INDEX2.5
IDXENC7: HAND_MICRO3.57 INDEX3.4
IDXENC8: HAND_MICRO3.58 INDEX3.5
IDXISEN: INDMID.1 R6.2
IDXISEN1: INDMID1.1 R22.2
IDXISEN2: INDMID2.1 R38.2
IDXISEN3: INDMID3.1 R54.2
IDXPWM1: HAND_MICRO.61 INDMID.14
IDXPWM2: HAND_MICRO.62 INDMID.13
IDXPWM3: HAND_MICRO1.62 INDMID1.13
IDXPWM4: HAND_MICRO1.61 INDMID1.14
IDXPWM5: HAND_MICRO2.62 INDMID2.13
IDXPWM6: HAND_MICRO2.61 INDMID2.14
IDXPWM7: HAND_MICRO3.62 INDMID3.13
IDXPWM8: HAND_MICRO3.61 INDMID3.14
LED0: HAND_MICRO.53 RED.1
LED1: GREEN.1 HAND_MICRO.54
LED2: HAND_MICRO.52 YELLOW.1
LED3: HAND_MICRO1.53 RED1.1
LED4: GREEN1.1 HAND_MICRO1.54
LED5: HAND_MICRO1.52 YELLOW1.1
LED6: HAND_MICRO2.53 RED2.1
LED7: GREEN2.1 HAND_MICRO2.54
LED8: HAND_MICRO2.52 YELLOW2.1
LED9: HAND_MICRO3.53 RED3.1
LED10: GREEN3.1 HAND_MICRO3.54
LED11: HAND_MICRO3.52 YELLOW3.1
MID1: INDMID.5 MIDDLE.2
MID2: INDMID.3 MIDDLE.1
MID3: INDMID1.3 MIDDLE1.1
MID4: INDMID1.5 MIDDLE1.2
MID5: INDMID2.3 MIDDLE2.1
MID6: INDMID2.5 MIDDLE2.2
MID7: INDMID3.3 MIDDLE3.1
MID8: INDMID3.5 MIDDLE3.2
MIDENC1: HAND_MICRO.60 MIDDLE.5
MIDENC2: HAND_MICRO.59 MIDDLE.4
MIDENC3: HAND_MICRO1.59 MIDDLE1.4
MIDENC4: HAND_MICRO1.60 MIDDLE1.5
MIDENC5: HAND_MICRO2.59 MIDDLE2.4
MIDENC6: HAND_MICRO2.60 MIDDLE2.5
MIDENC7: HAND_MICRO3.59 MIDDLE3.4
MIDENC8: HAND_MICRO3.60 MIDDLE3.5
MIDISEN: INDMID.4 R7.2
MIDISEN1: INDMID1.4 R23.2
MIDISEN2: INDMID2.4 R39.2
MIDISEN3: INDMID3.4 R55.2
MIDPWM1: HAND_MICRO.64 INDMID.7
MIDPWM2: HAND_MICRO.63 INDMID.8
MIDPWM3: HAND_MICRO1.63 INDMID1.8
MIDPWM4: HAND_MICRO1.64 INDMID1.7
MIDPWM5: HAND_MICRO2.63 INDMID2.8
MIDPWM6: HAND_MICRO2.64 INDMID2.7
MIDPWM7: HAND_MICRO3.63 INDMID3.8
MIDPWM8: HAND_MICRO3.64 INDMID3.7
N$1: R14.1 RED.2
N$2: GREEN.2 R15.1
N$3: R16.1 YELLOW.2
N$4: IMF.P$1 INDMID.6
N$5: PKYRNG.6 PYF.P$1
N$6: TF.P$1 THMB.6
N$7: C10.1 HAND_MICRO.13 R3.1 U$4.2
N$8: BOOTLOADER.9 HAND_MICRO.24
N$9: C11.1 HAND_MICRO.14 R3.2
N$10: BOOTLOADER.8 HAND_MICRO.22
N$11: BOOTLOADER.7 HAND_MICRO.25
N$12: BOOTLOADER.10 RST.P$1
N$13: BOOTLOADER1.4 BOOTLOADER1.13 HAND_MICRO1.34
N$14: C29.2 C30.2 C31.2 HAND_MICRO1.15 HAND_MICRO1.16 U$14.2
N$15: C20.1 INDMID1.9
N$16: C23.1 PKYRNG1.9
N$17: BOOTLOADER.4 BOOTLOADER.13 HAND_MICRO.34
N$18: C10.2 C11.2 C12.2 HAND_MICRO.15 HAND_MICRO.16 U$3.2
N$19: C26.1 THMB1.9
N$20: C27.1 THMB1.12
N$21: C1.1 INDMID.9
N$22: C4.1 PKYRNG.9
N$23: C7.1 THMB.9
N$24: HAND_MICRO.33 O16.3
N$25: C8.1 THMB.12
N$26: C5.1 PKYRNG.12
N$27: C2.1 INDMID.12
N$28: HAND_MICRO.32 O16.1
N$29: C24.1 PKYRNG1.12
N$30: C21.1 INDMID1.12
N$31: HAND_MICRO1.33 O1.3
N$32: HAND_MICRO1.32 O1.1
N$33: C31.1 HAND_MICRO1.17
N$34: C12.1 HAND_MICRO.17
N$35: BOOTLOADER.6 HAND_MICRO.23 USB.4
N$36: BOOTLOADER1.6 HAND_MICRO1.23 USB1.4
N$37: R30.1 RED1.2
N$38: GREEN1.2 R31.1
N$39: R32.1 YELLOW1.2
N$40: IMF1.P$1 INDMID1.6
N$41: PKYRNG1.6 PYF1.P$1
N$42: TF1.P$1 THMB1.6
N$43: C29.1 HAND_MICRO1.13 R19.1 U$15.2
N$44: C30.1 HAND_MICRO1.14 R19.2
N$45: BOOTLOADER1.9 HAND_MICRO1.24
N$46: BOOTLOADER1.8 HAND_MICRO1.22
N$47: BOOTLOADER1.7 HAND_MICRO1.25
N$48: BOOTLOADER1.10 RST1.P$1
N$49: BOOTLOADER2.4 BOOTLOADER2.13 HAND_MICRO2.34
N$50: C48.2 C49.2 C50.2 HAND_MICRO2.15 HAND_MICRO2.16 U$26.2
N$51: C39.1 INDMID2.9
N$52: C42.1 PKYRNG2.9
N$53: C45.1 THMB2.9
N$54: C46.1 THMB2.12
N$55: C43.1 PKYRNG2.12
N$56: C40.1 INDMID2.12
N$57: HAND_MICRO2.33 O2.3
N$58: HAND_MICRO2.32 O2.1
N$59: C50.1 HAND_MICRO2.17
N$60: BOOTLOADER2.6 HAND_MICRO2.23 USB2.4
N$61: R46.1 RED2.2
N$62: GREEN2.2 R47.1
N$63: R48.1 YELLOW2.2
N$64: IMF2.P$1 INDMID2.6
N$65: PKYRNG2.6 PYF2.P$1
N$66: TF2.P$1 THMB2.6
N$67: C48.1 HAND_MICRO2.13 R35.1 U$27.2
N$68: C49.1 HAND_MICRO2.14 R35.2
N$69: BOOTLOADER2.9 HAND_MICRO2.24
N$70: BOOTLOADER2.8 HAND_MICRO2.22
N$71: BOOTLOADER2.7 HAND_MICRO2.25
N$72: BOOTLOADER2.10 RST2.P$1
N$73: BOOTLOADER3.4 BOOTLOADER3.13 HAND_MICRO3.34
N$74: C67.2 C68.2 C69.2 HAND_MICRO3.15 HAND_MICRO3.16 U$38.2
N$75: C58.1 INDMID3.9
N$76: C61.1 PKYRNG3.9
N$77: C64.1 THMB3.9
N$78: C65.1 THMB3.12
N$79: C62.1 PKYRNG3.12
N$80: C59.1 INDMID3.12
N$81: HAND_MICRO3.33 O3.3
N$82: HAND_MICRO3.32 O3.1
N$83: C69.1 HAND_MICRO3.17
N$84: BOOTLOADER3.6 HAND_MICRO3.23 USB3.4
N$85: R62.1 RED3.2
N$86: GREEN3.2 R63.1
N$87: R64.1 YELLOW3.2
N$88: IMF3.P$1 INDMID3.6
N$89: PKYRNG3.6 PYF3.P$1
N$90: TF3.P$1 THMB3.6
N$91: C67.1 HAND_MICRO3.13 R51.1 U$39.2
N$92: C68.1 HAND_MICRO3.14 R51.2
N$93: BOOTLOADER3.9 HAND_MICRO3.24
N$94: BOOTLOADER3.8 HAND_MICRO3.22
N$95: BOOTLOADER3.7 HAND_MICRO3.25
N$96: BOOTLOADER3.10 RST3.P$1
PKY1: PINKY.2 PKYRNG.5
PKY2: PINKY.1 PKYRNG.3
PKY3: PINKY1.2 PKYRNG1.5
PKY4: PINKY1.1 PKYRNG1.3
PKY5: PINKY2.2 PKYRNG2.5
PKY6: PINKY2.1 PKYRNG2.3
PKY7: PINKY3.2 PKYRNG3.5
PKY8: PINKY3.1 PKYRNG3.3
PKYENC1: HAND_MICRO.26 PINKY.5
PKYENC2: HAND_MICRO.27 PINKY.4
PKYENC3: HAND_MICRO1.26 PINKY1.5
PKYENC4: HAND_MICRO1.27 PINKY1.4
PKYENC5: HAND_MICRO2.26 PINKY2.5
PKYENC6: HAND_MICRO2.27 PINKY2.4
PKYENC7: HAND_MICRO3.26 PINKY3.5
PKYENC8: HAND_MICRO3.27 PINKY3.4
PKYISEN: HAND_MICRO.9 PKYRNG.4 R9.2
PKYISEN1: HAND_MICRO1.9 PKYRNG1.4 R25.2
PKYISEN2: HAND_MICRO2.9 PKYRNG2.4 R41.2
PKYISEN3: HAND_MICRO3.9 PKYRNG3.4 R57.2
PKYPWM1: HAND_MICRO.28 PKYRNG.7
PKYPWM2: HAND_MICRO.29 PKYRNG.8
PKYPWM3: HAND_MICRO1.29 PKYRNG1.8
PKYPWM4: HAND_MICRO1.28 PKYRNG1.7
PKYPWM5: HAND_MICRO2.29 PKYRNG2.8
PKYPWM6: HAND_MICRO2.28 PKYRNG2.7
PKYPWM7: HAND_MICRO3.29 PKYRNG3.8
PKYPWM8: HAND_MICRO3.28 PKYRNG3.7
RNG1: PKYRNG.16 RING.1
RNG2: PKYRNG.2 RING.2
RNG3: PKYRNG1.16 RING1.1
RNG4: PKYRNG1.2 RING1.2
RNG5: PKYRNG2.16 RING2.1
RNG6: PKYRNG2.2 RING2.2
RNG7: PKYRNG3.16 RING3.1
RNG8: PKYRNG3.2 RING3.2
RNGENC1: HAND_MICRO.2 RING.5
RNGENC2: HAND_MICRO.1 RING.4
RNGENC3: HAND_MICRO1.1 RING1.4
RNGENC4: HAND_MICRO1.2 RING1.5
RNGENC5: HAND_MICRO2.1 RING2.4
RNGENC6: HAND_MICRO2.2 RING2.5
RNGENC7: HAND_MICRO3.1 RING3.4
RNGENC8: HAND_MICRO3.2 RING3.5
RNGISEN: HAND_MICRO.10 PKYRNG.1 R8.2
RNGISEN1: HAND_MICRO1.10 PKYRNG1.1 R24.2
RNGISEN2: HAND_MICRO2.10 PKYRNG2.1 R40.2
RNGISEN3: HAND_MICRO3.10 PKYRNG3.1 R56.2
RNGPWM1: HAND_MICRO.46 PKYRNG.14
RNGPWM2: HAND_MICRO.49 PKYRNG.13
RNGPWM3: HAND_MICRO1.49 PKYRNG1.13
RNGPWM4: HAND_MICRO1.46 PKYRNG1.14
RNGPWM5: HAND_MICRO2.49 PKYRNG2.13
RNGPWM6: HAND_MICRO2.46 PKYRNG2.14
RNGPWM7: HAND_MICRO3.49 PKYRNG3.13
RNGPWM8: HAND_MICRO3.46 PKYRNG3.14
SCL0: HAND_MICRO.37 R10.1 U$1.14 U$5.C U$7.C U$8.C U$11.SCL
SCL1: HAND_MICRO.55 R12.1 U$12.SCL
SCL2: HAND_MICRO1.37 R26.1 U$13.14 U$17.C U$18.C U$20.C U$23.SCL
SCL3: HAND_MICRO1.55 R28.1 U$24.SCL
SCL4: HAND_MICRO2.37 R42.1 U$25.14 U$29.C U$30.C U$32.C U$35.SCL
SCL5: HAND_MICRO2.55 R44.1 U$36.SCL
SCL6: HAND_MICRO3.37 R58.1 U$37.14 U$41.C U$42.C U$44.C U$47.SCL
SCL7: HAND_MICRO3.55 R60.1 U$48.SCL
SDA0: HAND_MICRO.38 R11.1 U$1.15 U$5.D U$7.D U$8.D U$11.SDA
SDA1: HAND_MICRO.56 R13.1 U$12.SDA
SDA2: HAND_MICRO1.38 R27.1 U$13.15 U$17.D U$18.D U$20.D U$23.SDA
SDA3: HAND_MICRO1.56 R29.1 U$24.SDA
SDA4: HAND_MICRO2.38 R43.1 U$25.15 U$29.D U$30.D U$32.D U$35.SDA
SDA5: HAND_MICRO2.56 R45.1 U$36.SDA
SDA6: HAND_MICRO3.38 R59.1 U$37.15 U$41.D U$42.D U$44.D U$47.SDA
SDA7: HAND_MICRO3.56 R61.1 U$48.SDA
THA1: THMB.16 THUMB_A.1
THA2: THMB.2 THUMB_A.2
THA3: THMB1.16 THUMB_A1.1
THA4: THMB1.2 THUMB_A1.2
THA5: THMB2.16 THUMB_A2.1
THA6: THMB2.2 THUMB_A2.2
THA7: THMB3.16 THUMB_A3.1
THA8: THMB3.2 THUMB_A3.2
THAENC1: HAND_MICRO.35 THUMB_A.5
THAENC2: HAND_MICRO.36 THUMB_A.4
THAENC3: HAND_MICRO1.36 THUMB_A1.4
THAENC4: HAND_MICRO1.35 THUMB_A1.5
THAENC5: HAND_MICRO2.36 THUMB_A2.4
THAENC6: HAND_MICRO2.35 THUMB_A2.5
THAENC7: HAND_MICRO3.36 THUMB_A3.4
THAENC8: HAND_MICRO3.35 THUMB_A3.5
THAISEN: HAND_MICRO.11 R4.2 THMB.1
THAISEN1: HAND_MICRO1.11 R20.2 THMB1.1
THAISEN2: HAND_MICRO2.11 R36.2 THMB2.1
THAISEN3: HAND_MICRO3.11 R52.2 THMB3.1
THAPWM1: HAND_MICRO.41 THMB.14
THAPWM2: HAND_MICRO.42 THMB.13
THAPWM3: HAND_MICRO1.42 THMB1.13
THAPWM4: HAND_MICRO1.41 THMB1.14
THAPWM5: HAND_MICRO2.42 THMB2.13
THAPWM6: HAND_MICRO2.41 THMB2.14
THAPWM7: HAND_MICRO3.42 THMB3.13
THAPWM8: HAND_MICRO3.41 THMB3.14
THB1: THMB.5 THUMB_B.2
THB2: THMB.3 THUMB_B.1
THB3: THMB1.3 THUMB_B1.1
THB4: THMB1.5 THUMB_B1.2
THB5: THMB2.3 THUMB_B2.1
THB6: THMB2.5 THUMB_B2.2
THB7: THMB3.3 THUMB_B3.1
THB8: THMB3.5 THUMB_B3.2
THBENC1: HAND_MICRO.51 THUMB_B.5
THBENC2: HAND_MICRO.50 THUMB_B.4
THBENC3: HAND_MICRO1.50 THUMB_B1.4
THBENC4: HAND_MICRO1.51 THUMB_B1.5
THBENC5: HAND_MICRO2.50 THUMB_B2.4
THBENC6: HAND_MICRO2.51 THUMB_B2.5
THBENC7: HAND_MICRO3.50 THUMB_B3.4
THBENC8: HAND_MICRO3.51 THUMB_B3.5
THBISEN: HAND_MICRO.12 R5.2 THMB.4
THBISEN1: HAND_MICRO1.12 R21.2 THMB1.4
THBISEN2: HAND_MICRO2.12 R37.2 THMB2.4
THBISEN3: HAND_MICRO3.12 R53.2 THMB3.4
THBPWM1: HAND_MICRO.45 THMB.7
THBPWM2: HAND_MICRO.44 THMB.8
THBPWM3: HAND_MICRO1.44 THMB1.8
THBPWM4: HAND_MICRO1.45 THMB1.7
THBPWM5: HAND_MICRO2.44 THMB2.8
THBPWM6: HAND_MICRO2.45 THMB2.7
THBPWM7: HAND_MICRO3.44 THMB3.8
THBPWM8: HAND_MICRO3.45 THMB3.7
USB_D1_N [USB]: D-.P$1 R1.1 USB.2
USB_D1_N1 [USB]: D-1.P$1 R17.1 USB1.2
USB_D1_N2 [USB]: D-2.P$1 R33.1 USB2.2
USB_D1_N3 [USB]: D-3.P$1 R49.1 USB3.2
USB_D1_P [USB]: D+.P$1 R2.1 USB.3
USB_D1_P1 [USB]: D+1.P$1 R18.1 USB1.3
USB_D1_P2 [USB]: D+2.P$1 R34.1 USB2.3
USB_D1_P3 [USB]: D+3.P$1 R50.1 USB3.3
USB_D2_N [USB]: HAND_MICRO.6 R1.2
USB_D2_N1 [USB]: HAND_MICRO1.6 R17.2
USB_D2_N2 [USB]: HAND_MICRO2.6 R33.2
USB_D2_N3 [USB]: HAND_MICRO3.6 R49.2
USB_D2_P [USB]: HAND_MICRO.5 R2.2
USB_D2_P1 [USB]: HAND_MICRO1.5 R18.2
USB_D2_P2 [USB]: HAND_MICRO2.5 R34.2
USB_D2_P3 [USB]: HAND_MICRO3.5 R50.2
VIN: U$2.2 U$10.B
VIN1: U$16.2 U$22.B
VIN2: U$28.2 U$34.B
VIN3: U$40.2 U$46.B

## Tracks (layer width: path | path; a pad name or v marks a point on that pad's centre or on a via)
+3V1  (via drill 0.38, 0.39)  (1 unrouted)
  Top 0.254: THUMB_A1.3 30.74,122.17 31.67,122.17 32.21,121.64 32.21,120.42 33.38,118.29 v33.48,116.97 | THUMB_B1.3 29.92,109.6 32,110.34 v32.66,112.29 | C32.1 56.17,110.44 56.06,110.44 55.62,110.8 HAND_MICRO1.21 52.63,110.8 51.77,111.56 51.33,111.99 v50.75,111.99 | 46.15,106.79 HAND_MICRO1.3 46.16,105.34 v45.9,105.08 | v48.59,108.51 48.16,108.28 HAND_MICRO1.7 48.16,105.72 48.06,105.61 | PINKY1.3 53.67,91.83 | 53.67,93.27 v53.61,93.33 | RING1.3 40.66,85.84 v40.69,87.07 | C33.1 44.76,103.94 | 48.06,105.61 47.88,105.44 v47.47,105.44 | MIDDLE1.3 24.74,84.86 v24.74,86.28 | INDEX1.3 11.86,83.9 v11.86,85.09 | HAND_MICRO1.8 48.66,105.9 48.65,105.84 48.42,105.61 48.06,105.61 | HAND_MICRO1.48 45.16,117.27 46.69,115.75 49.51,115.75 51.28,115.27 52.16,115.3 v52.13,115.28 v52.13,115.29 | HAND_MICRO1.48 45.16,118.42 44.11,119.47 44.11,120.24 C35.1 | v58.94,115.7 58.78,115.7 58.08,115 57.51,115 C34.1 57.37,114.94 56.52,114.94 56.15,115.3 HAND_MICRO1.30 | HAND_MICRO1.48 43.86,118.3 v42.99,117.42 | U$13.1 30.4,90.34 30.4,90.35 | 30.4,90.35 30.4,91.03 | 30.4,91.03 30.4,91.64 U$13.3 33.39,91.64 C38.1 | U$13.2 31.41,91.03 30.4,91.03 | U$13.16 26.75,90.34 v26.85,90.35 | v30.12,90.35 30.4,90.35 | v62.04,116.36 61.66,115.98 BOOTLOADER1.1
  Top 0.762: 53.67,91.83 53.67,93.27 | v53.61,93.33 44.76,102.18 C33.1 | 44.76,103.94 44.93,104.32 45.7,105.08 v45.9,105.08
  Top 1.016: v62.04,116.36 61.39,117.54 60.83,118.67 59.08,119.58 59.08,122.35 58.5,123.5 56.72,123.5 54.34,125.31 R26.2 R27.2 | 48.44,125.35 47.47,125.35 v46.3,124.18 | C37.1 56.58,126.96 v53.31,125.73 53.34,125.4 52.6,125.35
  Route2 0.254: v32.66,112.29 v33.48,116.97 33.88,116.56 41.9,116.56 42.63,117.42 v42.99,117.42 | v53.61,93.33 53.61,91.99 46.13,84.51 42,84.51 RING1.3 v40.69,87.07 | v24.74,86.28 23.65,83.8 17.8,83.8 16.36,82.47 12.78,82.78 v11.86,85.09 | v26.85,90.35 v30.12,90.35
  Bottom 0.254: 49.97,110.47 U$15.1 50.05,111.1 50.05,111.29 | 46.25,105.44 v45.9,105.08 | R29.2 48.78,111.72 R28.2 | v40.69,87.07 40.69,85.42 39.8,84.53 31.5,84.53 30.23,82.53 27.3,82.53 | 27.3,82.53 26.59,83.82 24.74,85.67 v24.74,86.28 25.65,87.2 28.55,87.2 30.12,88.77 v30.12,90.35 | U$17.V 31.57,79.7 27.3,82.53 | U$20.V 7.92,81.15 v11.86,85.09
  Bottom 0.762: v50.75,111.99 50.75,113.54
  Bottom 1.016: U$15.1 49.51,110.64 48.49,109.63 48.49,106.86 47.02,105.39 | v47.47,105.44 46.25,105.44 | v50.75,111.99 50.05,111.29 | v62.04,116.36 59.6,116.36 v58.94,115.7 58.66,115.55 52.91,115.55 v52.13,115.29 50.75,113.54 | R29.2 49.38,111.1 50.05,111.1 | U$21.3 55.41,128.06 54.18,128.04 53.31,127.18 v53.31,125.73 | v42.99,117.42 43,117.44 43.79,118.69 46.3,121.31 v46.3,124.18
  pour Route2 (isolate 0.508): 47.09,79.3 46.79,85.47 66.22,86.46 64.19,127.71 61.77,130.38 23.52,130.38 23.65,127.84 23.93,126.72 24.26,125.91 24.61,125.02 25.2,122.76 25.5,120.4 25.53,118.24 25.43,117.65 25.27,116.56 24.61,112.75 24.08,109.37 23.77,108.84 23.55,108.2 22.3,106.4 21.29,105.31 20.04,104.32 18.59,103.4 16.71,102.57 13.61,101.68 10.44,100.71 4.7,98.86 3.45,72.92 16.38,72.24 16.43,77.83 41.78,79.04
+3V2  (via drill 0.38, 0.39)  (1 unrouted)
  Top 0.254: THUMB_A2.3 113.43,78.77 112.5,78.77 111.96,79.3 111.96,80.52 110.8,82.65 v110.69,83.97 | THUMB_B2.3 114.25,91.34 112.17,90.6 v111.51,88.65 | C51.1 88,90.5 88.11,90.5 88.55,90.14 HAND_MICRO2.21 91.54,90.14 92.41,89.38 92.84,88.95 v93.42,88.95 | 98.02,94.15 HAND_MICRO2.3 98.01,95.6 v98.27,95.86 | v95.58,92.43 96.01,92.66 HAND_MICRO2.7 96.01,95.22 96.11,95.33 | PINKY2.3 90.5,109.11 | 90.5,107.67 v90.56,107.61 | RING2.3 103.5,115.1 v103.48,113.87 | C52.1 99.41,97 | 96.11,95.33 96.29,95.5 v96.7,95.5 | MIDDLE2.3 119.43,116.08 v119.43,114.66 | INDEX2.3 132.31,117.04 v132.31,115.85 | HAND_MICRO2.8 95.51,95.04 95.52,95.1 95.75,95.33 96.11,95.33 | HAND_MICRO2.48 99.01,83.67 97.48,85.19 94.67,85.19 92.89,85.67 92.01,85.64 v92.04,85.66 v92.04,85.65 | HAND_MICRO2.48 99.01,82.52 100.06,81.47 100.06,80.7 C54.1 | v85.23,85.24 85.39,85.24 86.09,85.94 86.66,85.94 C53.1 86.8,86 87.66,86 88.02,85.64 HAND_MICRO2.30 | HAND_MICRO2.48 100.31,82.64 v101.18,83.52 | U$25.1 113.77,110.6 113.77,110.59 | 113.77,110.59 113.77,109.91 | 113.77,109.91 113.77,109.3 U$25.3 110.78,109.3 C57.1 | U$25.2 112.76,109.91 113.77,109.91 | U$25.16 117.42,110.6 v117.32,110.59 | v114.05,110.59 113.77,110.59 | v82.13,84.58 82.51,84.96 BOOTLOADER2.1
  Top 0.762: 90.5,109.11 90.5,107.67 | v90.56,107.61 99.41,98.76 C52.1 | 99.41,97 99.24,96.62 98.48,95.86 v98.27,95.86
  Top 1.016: v82.13,84.58 82.78,83.4 83.34,82.27 85.09,81.36 85.09,78.59 85.67,77.44 87.45,77.44 89.83,75.63 R42.2 R43.2 | 95.73,75.59 96.7,75.59 v97.87,76.76 | C56.1 87.59,73.98 v90.86,75.21 90.83,75.54 91.57,75.59
  Route2 0.254: v111.51,88.65 v110.69,83.97 110.29,84.38 102.27,84.38 101.54,83.52 v101.18,83.52 | v90.56,107.61 90.56,108.95 98.04,116.43 102.17,116.43 RING2.3 v103.48,113.87 | v119.43,114.66 120.52,117.14 126.36,117.14 127.81,118.47 131.39,118.16 v132.31,115.85 | v117.32,110.59 v114.05,110.59
  Bottom 0.254: 94.2,90.47 U$27.1 94.12,89.84 94.12,89.65 | 97.92,95.5 v98.27,95.86 | R45.2 95.39,89.22 R44.2 | v103.48,113.87 103.48,115.52 104.37,116.41 112.67,116.41 113.94,118.42 116.86,118.42 | 116.86,118.42 117.58,117.12 119.43,115.27 v119.43,114.66 118.52,113.74 115.62,113.74 114.05,112.17 v114.05,110.59 | U$29.V 112.6,121.23 116.86,118.42 | U$32.V 136.25,119.79 v132.31,115.85
  Bottom 0.762: v93.42,88.95 93.42,87.4
  Bottom 1.016: U$27.1 94.67,90.3 95.68,91.31 95.68,94.08 97.16,95.56 | v96.7,95.5 97.92,95.5 | v93.42,88.95 94.12,89.65 | v82.13,84.58 84.57,84.58 v85.23,85.24 85.51,85.39 91.26,85.39 v92.04,85.65 93.42,87.4 | R45.2 94.79,89.84 94.12,89.84 | U$33.3 88.76,72.88 89.99,72.9 90.86,73.76 v90.86,75.21 | v101.18,83.52 101.17,83.5 100.38,82.25 97.87,79.63 v97.87,76.76
  pour Route2 (isolate 0.508): 97.08,121.64 97.38,115.47 77.95,114.48 79.98,73.23 82.4,70.56 120.65,70.56 120.52,73.1 120.24,74.22 119.91,75.03 119.56,75.92 118.97,78.18 118.67,80.54 118.64,82.7 118.75,83.29 118.9,84.38 119.56,88.19 120.09,91.57 120.4,92.1 120.62,92.74 121.87,94.54 122.89,95.63 124.13,96.62 125.58,97.54 127.46,98.37 130.56,99.26 133.73,100.23 139.47,102.08 140.72,128.02 127.79,128.7 127.74,123.11 102.39,121.89
+3V3  (via drill 0.38, 0.39)  (1 unrouted)
  Top 0.254: THUMB_A.3 39.54,15.52 38.61,15.52 38.08,16.05 38.08,17.27 36.91,19.41 v36.8,20.73 | THUMB_B.3 40.36,28.09 38.28,27.36 v37.62,25.4 | C13.1 14.11,27.25 14.22,27.25 14.66,26.9 HAND_MICRO.21 17.66,26.9 18.52,26.14 18.95,25.7 v19.53,25.7 | HAND_MICRO.3 24.12,32.35 v24.38,32.61 | v21.69,29.18 22.12,29.42 HAND_MICRO.7 22.12,31.98 22.23,32.08 | PINKY.3 16.61,45.86 | 16.61,44.42 v16.68,44.36 | RING.3 29.62,51.85 v29.59,50.62 | C14.1 25.52,33.75 | 22.23,32.08 22.4,32.26 v22.81,32.26 | MIDDLE.3 45.54,52.83 v45.54,51.41 | INDEX.3 58.42,53.8 v58.42,52.6 | HAND_MICRO.8 21.62,31.8 21.63,31.85 21.86,32.08 22.23,32.08 | HAND_MICRO.48 25.12,20.42 23.6,21.95 20.78,21.95 19,22.43 18.12,22.39 v18.15,22.41 | HAND_MICRO.48 25.12,19.27 26.18,18.22 26.18,17.45 C16.1 | v11.34,22 11.51,22 12.21,22.7 12.77,22.7 C15.1 12.91,22.76 13.77,22.76 14.13,22.4 HAND_MICRO.30 | HAND_MICRO.48 26.42,19.4 v27.29,20.27 | U$1.1 39.88,47.35 | 39.88,47.35 39.88,46.66 | 39.88,46.66 39.88,46.05 U$1.3 36.89,46.05 C19.1 | U$1.2 38.88,46.66 39.88,46.66 | U$1.16 43.54,47.35 v43.43,47.35 | v40.16,47.35 39.88,47.35 | v8.24,21.34 8.62,21.71 BOOTLOADER.1
  Top 0.762: 16.61,45.86 16.61,44.42 | v16.68,44.36 25.52,35.52 C14.1 | 25.52,33.75 25.35,33.38 24.59,32.61 v24.38,32.61
  Top 1.016: v8.24,21.34 8.89,20.16 9.45,19.02 11.2,18.11 11.2,15.34 11.79,14.2 13.56,14.2 15.94,12.38 R10.2 R11.2 | 21.84,12.34 22.81,12.34 v23.98,13.51 | C18.1 13.7,10.73 v16.97,11.96 16.94,12.29 17.68,12.34
  Route2 0.254: v37.62,25.4 v36.8,20.73 36.4,21.13 28.38,21.13 27.65,20.27 v27.29,20.27 | v16.68,44.36 16.68,45.71 24.16,53.19 28.28,53.19 RING.3 v29.59,50.62 | v45.54,51.41 46.63,53.9 52.48,53.9 53.92,55.22 57.51,54.91 v58.42,52.6 | v43.43,47.35 v40.16,47.35
  Bottom 0.254: 20.31,27.23 U$4.1 20.23,26.59 20.23,26.4 | 24.03,32.26 v24.38,32.61 | R13.2 21.5,25.97 R12.2 | v29.59,50.62 29.59,52.27 30.48,53.16 38.79,53.16 40.06,55.17 42.98,55.17 | 42.98,55.17 43.69,53.87 45.54,52.02 v45.54,51.41 44.63,50.49 41.73,50.49 40.16,48.92 v40.16,47.35 | U$5.V 38.71,57.99 42.98,55.17 | U$8.V 62.36,56.54 v58.42,52.6
  Bottom 0.762: v19.53,25.7 19.53,24.16
  Bottom 1.016: U$4.1 20.78,27.05 21.79,28.07 21.79,30.84 23.27,32.31 | v22.81,32.26 24.03,32.26 | v19.53,25.7 20.23,26.4 | v8.24,21.34 10.68,21.34 v11.34,22 11.62,22.15 17.37,22.15 v18.15,22.41 19.53,24.16 | R13.2 20.91,26.59 20.23,26.59 | U$9.3 14.87,9.64 16.1,9.65 16.97,10.52 v16.97,11.96 | v27.29,20.27 27.28,20.26 26.49,19 23.98,16.38 v23.98,13.51
  pour Route2 (isolate 0.508): 23.19,58.39 23.5,52.22 4.06,51.23 6.1,9.98 8.51,7.32 46.76,7.32 46.63,9.86 46.35,10.97 46.02,11.79 45.67,12.67 45.09,14.94 44.78,17.3 44.75,19.46 44.86,20.04 45.01,21.13 45.67,24.94 46.2,28.32 46.51,28.85 46.74,29.49 47.98,31.29 49,32.38 50.24,33.38 51.69,34.29 53.57,35.13 56.67,36.02 59.84,36.98 65.58,38.84 66.83,64.77 53.9,65.46 53.85,59.87 28.5,58.65
+3V4  (via drill 0.38, 0.39)  (1 unrouted)
  Top 0.254: THUMB_A3.3 102.04,53.85 102.97,53.85 103.5,53.31 103.5,52.09 104.67,49.96 v104.78,48.64 | THUMB_B3.3 101.22,41.27 103.3,42.01 v103.96,43.97 | C70.1 127.47,42.11 127.36,42.11 126.92,42.47 HAND_MICRO3.21 123.92,42.47 123.06,43.23 122.63,43.66 v122.05,43.66 | HAND_MICRO3.3 117.46,37.02 v117.2,36.75 | v119.89,40.18 119.46,39.95 HAND_MICRO3.7 119.46,37.39 119.36,37.29 | PINKY3.3 124.97,23.51 | 124.97,24.94 v124.9,25.01 | RING3.3 111.96,17.51 v111.99,18.75 | C71.1 116.06,35.62 | 119.36,37.29 119.18,37.11 v118.77,37.11 | MIDDLE3.3 96.04,16.53 v96.04,17.96 | INDEX3.3 83.16,15.57 v83.16,16.76 | HAND_MICRO3.8 119.96,37.57 119.95,37.52 119.72,37.29 119.36,37.29 | HAND_MICRO3.48 116.46,48.95 117.98,47.42 120.8,47.42 122.58,46.94 123.46,46.98 v123.43,46.95 v123.43,46.96 | HAND_MICRO3.48 116.45,50.09 115.41,51.14 115.41,51.91 C73.1 | v130.24,47.37 130.07,47.37 129.38,46.67 128.81,46.67 C72.1 128.67,46.61 127.81,46.61 127.45,46.97 HAND_MICRO3.30 | HAND_MICRO3.48 115.16,49.97 v114.29,49.1 | U$37.1 101.7,22.02 | 101.7,22.02 101.7,22.71 | 101.7,22.71 101.7,23.32 U$37.3 104.69,23.32 C76.1 | U$37.2 102.7,22.71 101.7,22.71 | U$37.16 98.04,22.02 v98.15,22.02 | v101.42,22.02 101.7,22.02 | v133.34,48.03 132.96,47.65 BOOTLOADER3.1
  Top 0.762: 124.97,23.51 124.97,24.94 | v124.9,25.01 116.06,33.85 C71.1 | 116.06,35.62 116.23,35.99 116.99,36.75 v117.2,36.75
  Top 1.016: v133.34,48.03 132.69,49.21 132.13,50.34 130.38,51.26 130.38,54.03 129.79,55.17 128.02,55.17 125.64,56.98 R58.2 R59.2 | 119.74,57.02 118.77,57.02 v117.6,55.85 | C75.1 127.88,58.63 v124.61,57.4 124.64,57.07 123.9,57.02
  Route2 0.254: v103.96,43.97 v104.78,48.64 105.18,48.23 113.19,48.23 113.93,49.1 v114.29,49.1 | v124.9,25.01 124.9,23.66 117.42,16.18 113.3,16.18 RING3.3 v111.99,18.74 v111.99,18.75 | v96.04,17.96 94.94,15.47 89.1,15.47 87.66,14.15 84.07,14.45 v83.16,16.76 | v98.15,22.02 v101.42,22.02
  Bottom 0.254: 121.27,42.14 U$39.1 121.35,42.77 121.35,42.97 | 117.55,37.11 v117.2,36.75 | R61.2 120.08,43.4 R60.2 | v111.99,18.75 111.99,17.09 111.1,16.2 102.79,16.2 101.52,14.2 98.6,14.2 | 98.6,14.2 97.89,15.49 96.04,17.35 v96.04,17.96 96.95,18.87 99.85,18.87 101.42,20.45 v101.42,22.02 | U$41.V 102.87,11.38 98.6,14.2 | U$44.V 79.22,12.83 v83.16,16.76
  Bottom 0.762: v122.05,43.66 122.05,45.21
  Bottom 1.016: U$39.1 120.8,42.32 119.79,41.3 119.79,38.53 118.31,37.06 | v118.77,37.11 117.55,37.11 | v122.05,43.66 121.35,42.97 | v133.34,48.03 130.9,48.03 v130.24,47.37 129.96,47.22 124.21,47.22 v123.43,46.96 122.05,45.21 | R61.2 120.67,42.77 121.35,42.77 | U$45.3 126.71,59.73 125.48,59.72 124.61,58.85 v124.61,57.4 | v114.29,49.1 v114.3,49.11 115.09,50.37 117.6,52.98 v117.6,55.85
  pour Route2 (isolate 0.508): 118.39,10.97 118.08,17.14 137.52,18.14 135.48,59.39 133.07,62.05 94.82,62.05 94.95,59.51 95.22,58.39 95.55,57.58 95.91,56.69 96.49,54.43 96.8,52.07 96.82,49.91 96.72,49.33 96.57,48.23 95.91,44.42 95.38,41.05 95.07,40.51 94.84,39.88 93.6,38.07 92.58,36.98 91.34,35.99 89.89,35.08 88.01,34.24 84.91,33.35 81.74,32.38 76,30.53 74.75,4.6 87.68,3.91 87.73,9.5 113.08,10.72
+5V  (via drill 0.38, 0.39)
  Top 0.254: THMB.15 34.92,16.97 35.61,16.28 35.61,13.16 36.44,12.33 38.76,12.33 v40.17,10.92 | PKYRNG.15 26.55,47.25 26.85,47.55 34.07,47.55 34.34,47.28 34.34,42.55 33.58,41.78 C6.1 33.58,42 | 29.11,10.12 C9.1 29.5,9.2 v30.66,8.04 | 30.77,12.73 31.04,12.76 | INDMID.15 64.56,46.97 65.9,45.63 65.62,41.83 63.94,40.26 63.94,38.75 63.52,38.33 60.3,38.33 58.55,40.08
  Top 0.381: 31.04,12.76 31.04,13.41 THMB.10 | PKYRNG.10 30.45,42.82 30.71,42.63 | C6.1 | INDMID.10 60.05,42.98 59.84,42.95 | 58.59,40.9 58.37,40.69
  Top 0.762: 30.35,12.27 30.77,12.73 | 30.71,42.63 31.42,42.32 | 59.84,42.95 59.63,42.34
  Top 1.016: v12.78,12.88 11.37,12.88 C17.1
  Top 1.27: C4.2 C6.1 | C1.2 58.37,40.69 C3.1 | C9.1 28.71,10.12 C7.2 | 29.11,10.12 29.11,11.61 29.77,12.27 30.35,12.27 | 31.42,42.32 32.3,41.78 C6.1 | 59.63,42.34 58.75,41.31 58.59,40.9
  Top 1.524: C4.2 34.61,40.45 35.12,39.95 35.12,37.24 v35.09,37.21 | v56.12,37.33 57.75,37.33 58.55,38.81 58.55,40.08 58.55,40.51 58.37,40.69
  Top 1.905: 24.08,8.57 24.52,8.12 27.96,8.12 28.71,8.5 28.71,10.12
  Top 2.794: v24.07,9.63 24.08,9.86 24.08,8.57
  Bottom 0.254: v40.17,10.92 40.17,10.95 38.8,12.32 34.94,12.32 v30.66,8.04
  Bottom 1.016: v22.96,10.41 19.93,13.45 U$9.1 13.35,13.45 v12.78,12.88
  Bottom 1.524: 33.96,11.58 34.38,12 34.84,12 34.98,12.14 35.18,12.14 35.37,12.33 35.67,12.33 35.89,12.55 36.52,12.55 37.07,13.09 37.54,13.09
  Bottom 1.905: 32.58,11.2 32.96,11.58 33.96,11.58
  Bottom 2.794: v35.09,37.21 35.09,35.53 36.13,34.49 | 36.13,34.49 39.64,34.49 40.09,34.95 43.61,34.95 | 43.61,34.95 45.39,34.95 46.08,35.64 49.23,35.64 52.4,37.03 55.14,37.03 v56.12,37.33 | 36.13,34.49 36.09,34.45 | 42.76,27.52 42.76,17.42 | 42.76,17.42 42.76,17.27 | v24.07,9.63 32.59,9.64 32.58,9.65 32.58,11.2 | 37.54,13.09 41.87,17.42 42.76,17.42 | 42.25,28.03 43.61,29.39 43.61,34.95
  Bottom 3.81: U$2.3 40.09,39.75 40.09,34.95
  other vias: 41.25,37.16 38.9,38.21 56.85,38.37 38.86,36.27 35.05,35.83 54.75,37.67 55.12,36.12 57.72,37.06 25.43,8.75 24.79,10.63 22.91,9.06 24.03,8.28 27.44,8.52 28.94,8.48
  pour Top (isolate 0.406): 30.21,42.86 32.14,42.86 32.75,42.25 35.29,42.25 39.83,41.82 41.97,40.14 41.87,35.52 33.79,35.24 33.73,37.6 34.26,37.77 34.26,39.55 34.06,39.75 32.36,39.75 30.48,41.63 30.48,42.55 30.19,42.84
  pour Top (isolate 0.406): 60.12,43.43 60.12,41.76 59.75,41.39 59.75,37.83 58.03,36.37 54.58,35.48 53.99,35.9 53.62,37.49 54.23,38.28 55.49,39.31 57.35,39.45 57.35,42.01 58.25,42.91 59.5,42.91 60.02,43.43
  pour Top (isolate 0.406): 31.08,13.17 31.08,11.89 30.1,10.91 30.1,9.32 30.57,8.85 31.13,8.85 31.43,8.55 31.43,7.44 30.87,6.88 23.11,6.88 22.01,7.99 22.01,9.74 23.2,10.93 24.71,10.93 25.37,10.27 25.37,9.47 26.12,8.72 27.11,8.72 27.58,9.19 27.58,11.52 28.89,12.83 30.04,12.83 30.35,13.14 31.03,13.14 31.04,13.16
  pour Bottom (isolate 1.016, rank 2): 39.42,41.64 42.93,41.64 44.11,40.49 46.35,38.38 50.06,38.19 52.82,38.14 54.34,38.51 55.52,39.19 57.45,38.94 58.55,38.28 58.51,37.21 57.91,36.47 56.64,36.12 54.84,35.64 53.07,35 51.61,34.32 49.77,33.08 48.4,31.79 47.29,30.34 46.42,28.88 46.2,28.19 45.12,22.03 44.78,19.94 44.74,17.36 44.89,16.14 45.03,14.91 45.61,12.73 46.13,11.44 46.47,10.43 46.61,9.45 46.76,7.29 22.76,7.33 21.04,7.82 21.08,10.44 23.77,12.12 27.37,13.39 26.91,20.29 35.33,21.08 37.39,23.58 35.1,28.78 31.7,33.29 28.32,37.92 22.54,38.47 21.49,50.06 36.26,48.18
+5V1  (via drill 0.38, 0.39)
  Top 0.254: THMB1.15 35.36,120.72 34.67,121.41 34.67,124.54 33.85,125.36 31.52,125.36 v30.11,126.77 | PKYRNG1.15 43.74,90.45 43.43,90.14 36.21,90.14 35.94,90.41 35.94,95.15 36.7,95.91 C25.1 36.7,95.69 | 41.17,127.57 C28.1 40.78,128.49 v39.62,129.65 | 39.52,124.96 39.24,124.94 | INDMID1.15 5.72,90.72 4.38,92.06 4.66,95.86 6.34,97.43 6.34,98.95 6.76,99.36 9.98,99.36 11.73,97.61
  Top 0.381: 39.24,124.94 39.24,124.28 THMB1.10 | PKYRNG1.10 39.84,94.87 39.57,95.06 | C25.1 | INDMID1.10 10.24,94.72 10.44,94.74 | 11.7,96.79 11.91,97.01
  Top 0.762: 39.93,125.42 39.52,124.96 | 39.57,95.06 38.86,95.38 | 10.44,94.74 10.65,95.35
  Top 1.016: v57.51,124.82 58.91,124.82 C36.1
  Top 1.27: C23.2 C25.1 | C20.2 11.91,97.01 C22.1 | C28.1 41.57,127.57 C26.2 | 41.17,127.57 41.17,126.09 40.51,125.42 39.93,125.42 | 38.86,95.38 37.99,95.91 C25.1 | 10.65,95.35 11.53,96.38 11.7,96.79
  Top 1.524: C23.2 35.67,97.24 35.17,97.74 35.17,100.46 v35.19,100.48 | v14.16,100.37 12.54,100.37 11.73,98.88 11.73,97.61 11.73,97.19 11.91,97.01
  Top 1.905: 46.2,129.12 45.76,129.58 42.32,129.58 41.57,129.2 41.57,127.57
  Top 2.794: v46.22,128.07 46.2,127.84 46.2,129.12
  Bottom 0.254: v30.11,126.77 30.11,126.75 31.48,125.37 35.34,125.37 v39.62,129.65
  Bottom 1.016: v47.32,127.28 50.36,124.24 U$21.1 56.93,124.24 v57.51,124.82
  Bottom 1.524: 36.32,126.11 35.9,125.69 35.45,125.69 35.31,125.55 35.1,125.55 34.91,125.36 34.61,125.36 34.39,125.15 33.76,125.15 33.21,124.6 32.74,124.6
  Bottom 1.905: 37.71,126.49 37.33,126.11 36.32,126.11
  Bottom 2.794: v35.19,100.48 35.19,102.16 34.15,103.2 | 34.15,103.2 30.64,103.2 30.19,102.74 26.67,102.74 | 26.67,102.74 24.89,102.74 24.21,102.06 21.06,102.06 17.88,100.66 15.14,100.66 v14.16,100.37 | 34.15,103.2 34.19,103.24 | 27.52,110.17 27.52,120.27 | 27.52,120.27 27.52,120.42 | v46.22,128.07 37.69,128.05 37.71,128.04 37.71,126.49 | 32.74,124.6 28.41,120.27 27.52,120.27 | 28.03,109.67 26.67,108.31 26.67,102.74
  Bottom 3.81: U$16.3 30.19,97.94 30.19,102.74
  other vias: 29.03,100.53 31.38,99.48 13.44,99.33 31.42,101.42 35.23,101.87 15.53,100.03 15.16,101.57 12.56,100.63 44.86,128.94 45.49,127.06 47.37,128.64 46.25,129.41 42.84,129.17 41.34,129.21
  pour Top (isolate 0.406): 40.07,94.83 38.14,94.83 37.53,95.44 34.99,95.44 30.45,95.87 28.31,97.55 28.41,102.17 36.49,102.45 36.55,100.09 36.02,99.92 36.02,98.15 36.22,97.94 37.92,97.94 39.8,96.06 39.8,95.15 40.09,94.86
  pour Top (isolate 0.406): 10.16,94.26 10.16,95.94 10.53,96.3 10.53,99.86 12.26,101.32 15.7,102.21 16.29,101.79 16.66,100.2 16.05,99.42 14.8,98.39 12.93,98.25 12.93,95.68 12.03,94.78 10.78,94.78 10.26,94.26